# Altium PCB 剥皮器20200614.PCBDOC (part 1 of 2)
Units mm, origin at the board's own origin, x right, y up, seen from the top; angles counter-clockwise.
Board outline 94.23 x 92 mm, 4 copper layers (Top Layer, MidLayer1, MidLayer2, Bottom Layer); 71 components, 81 nets, 348 pads, 574 vias.
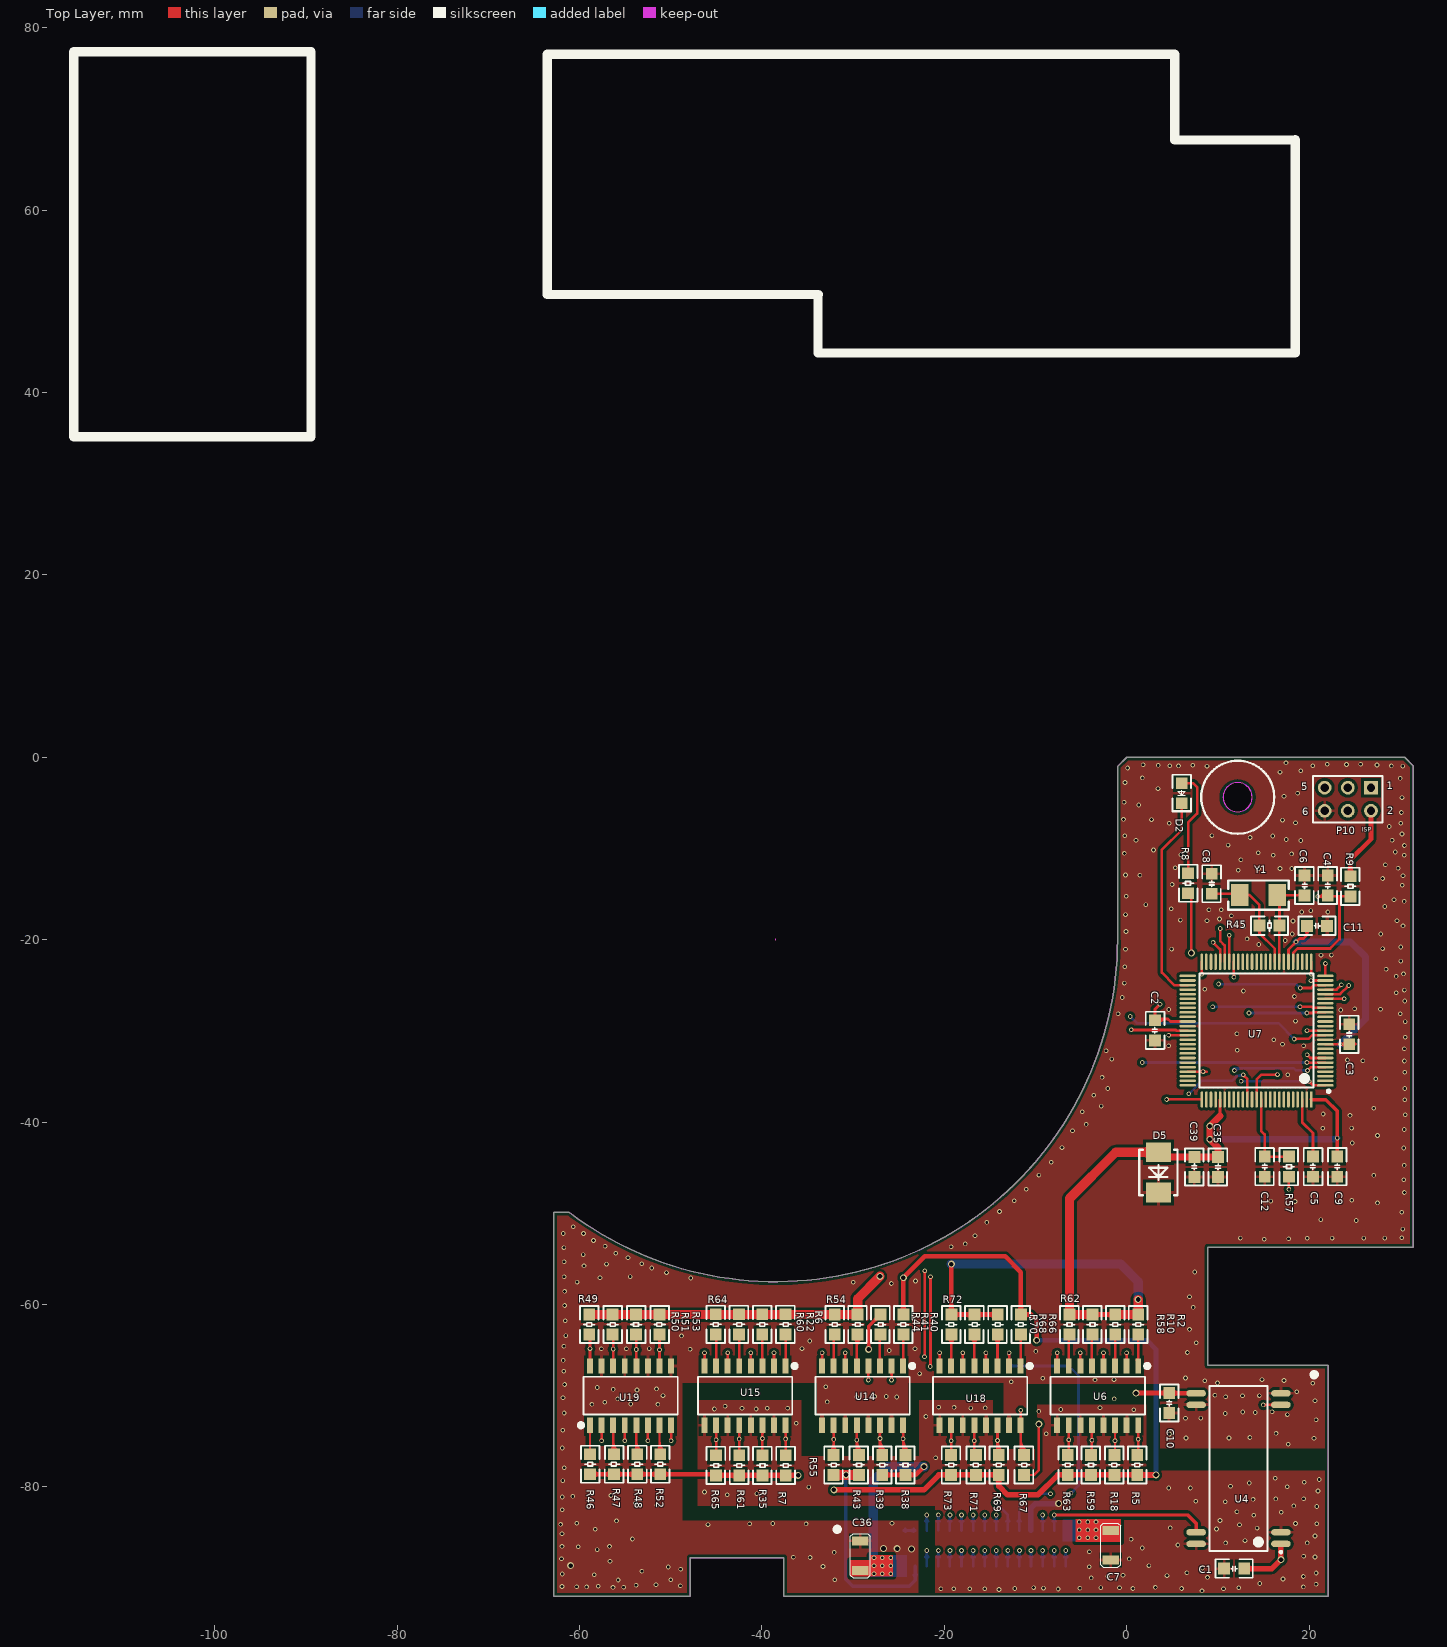
[diagram p0: Top Layer view]
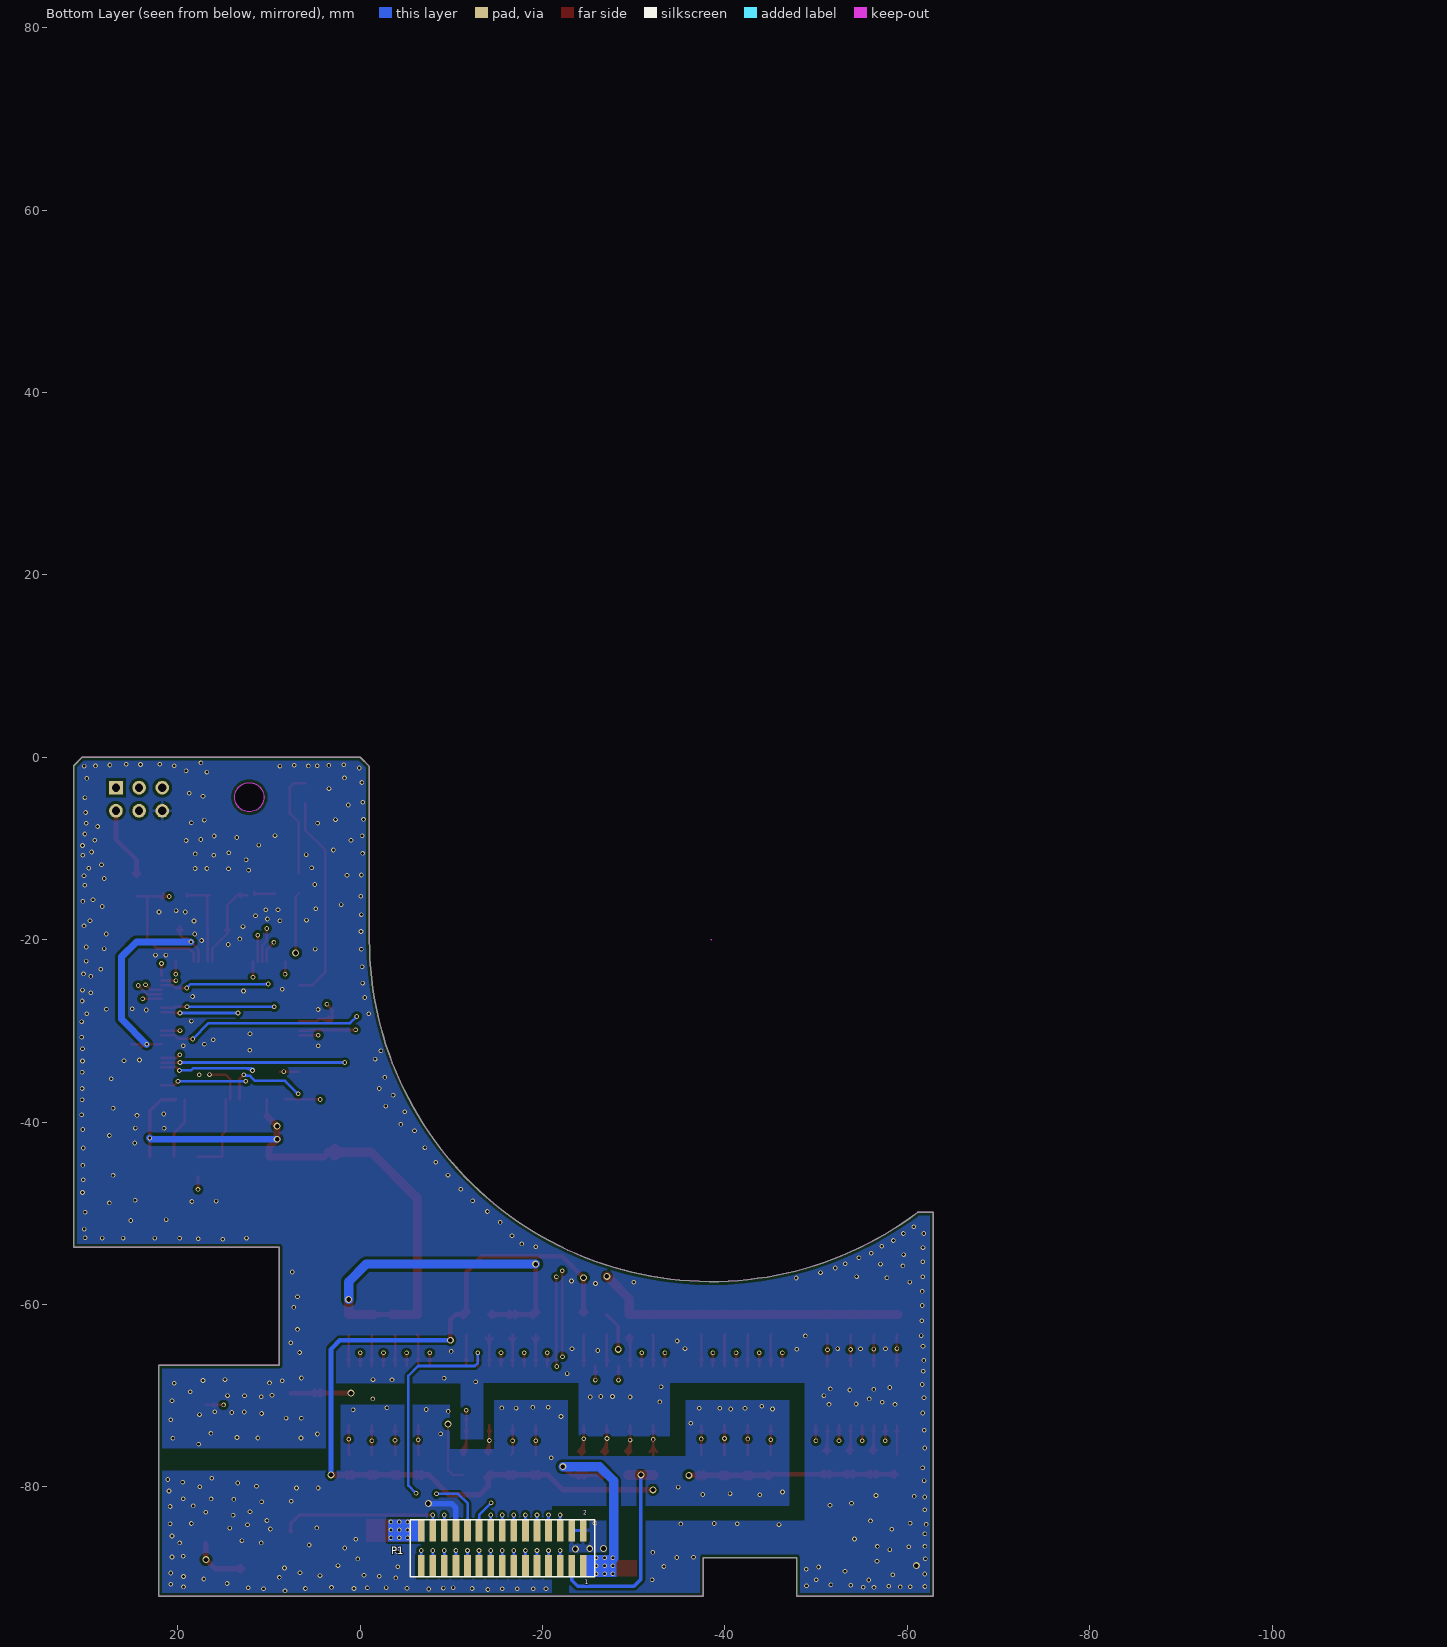
[diagram p1: Bottom Layer view, seen from below]
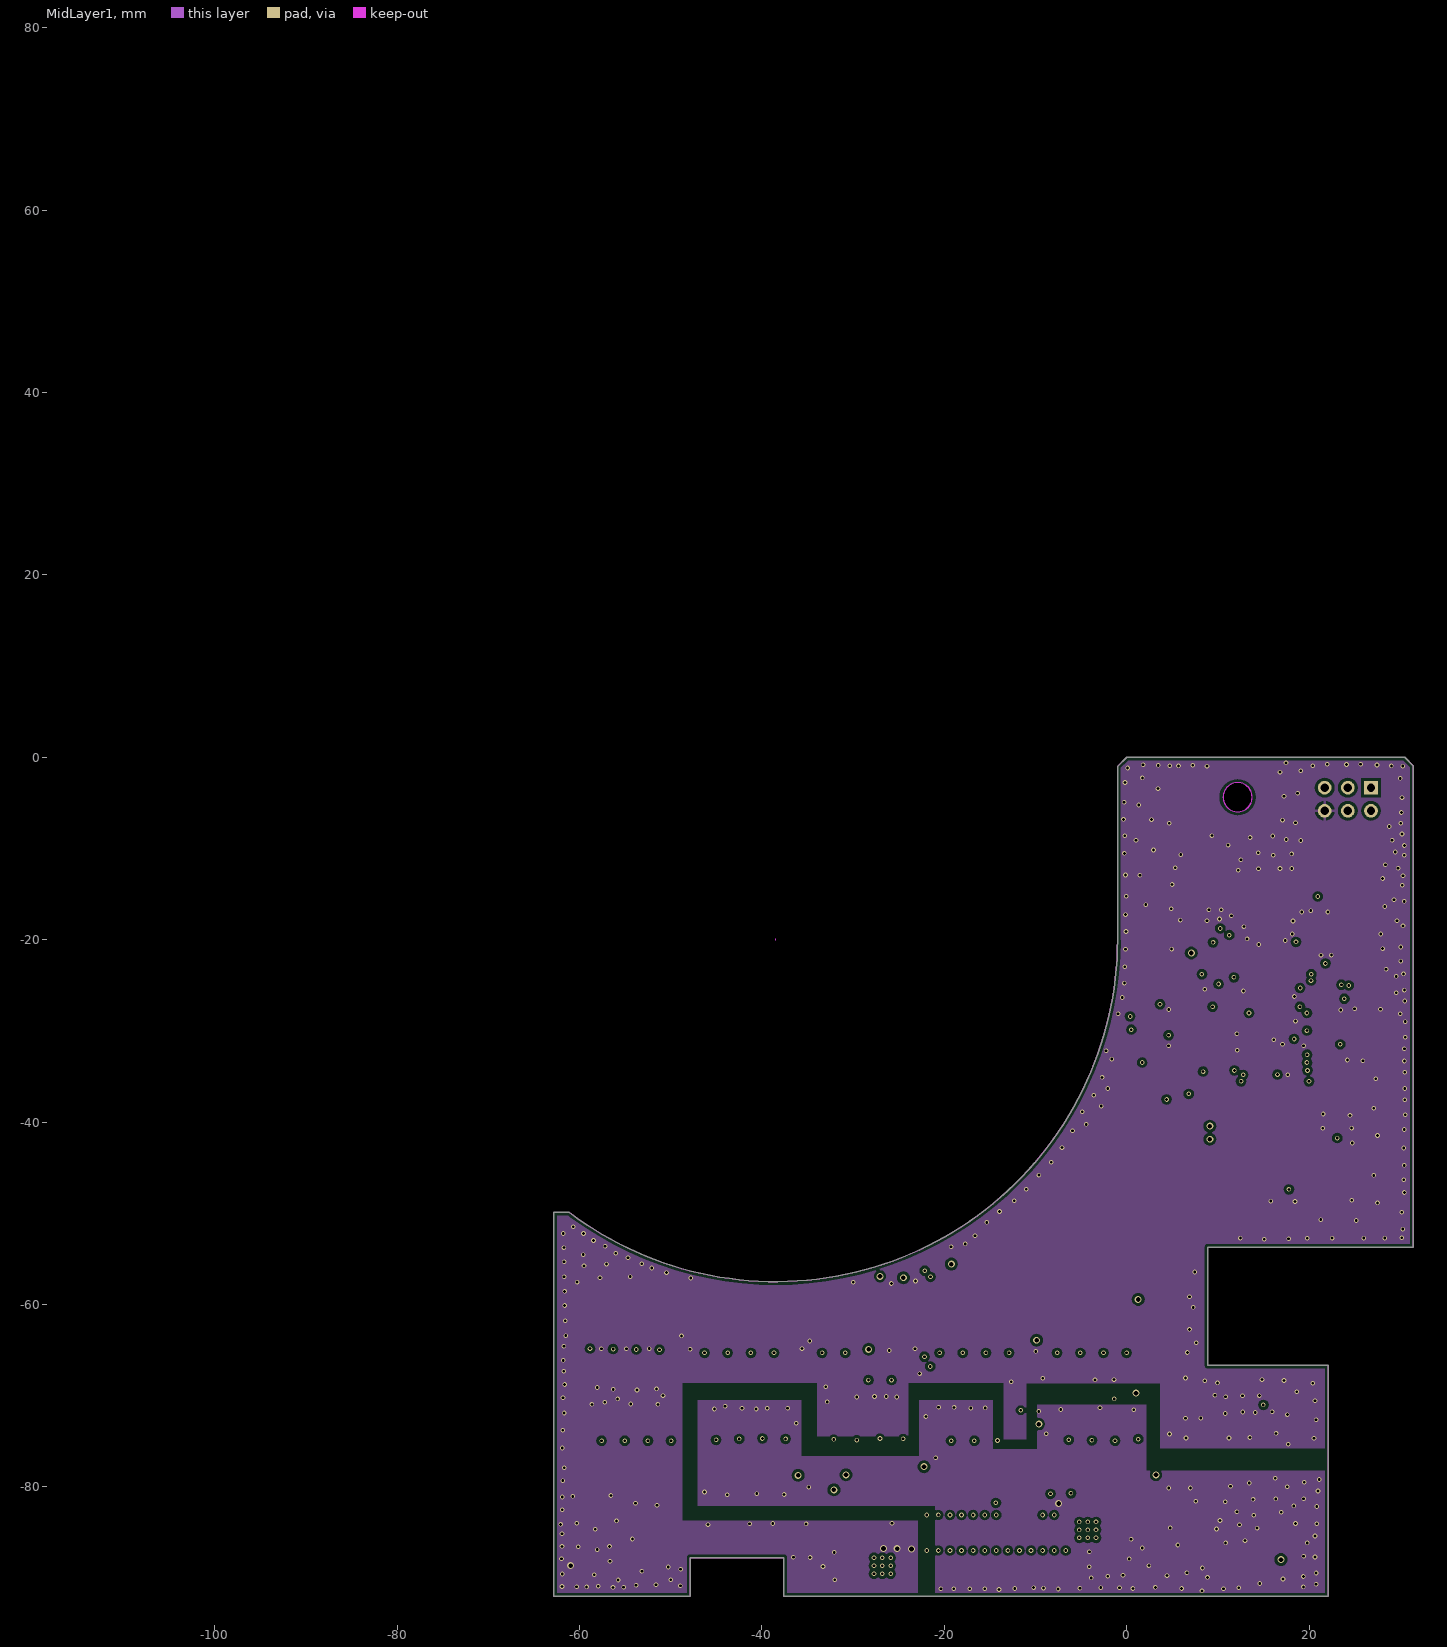
[diagram p2: MidLayer1]
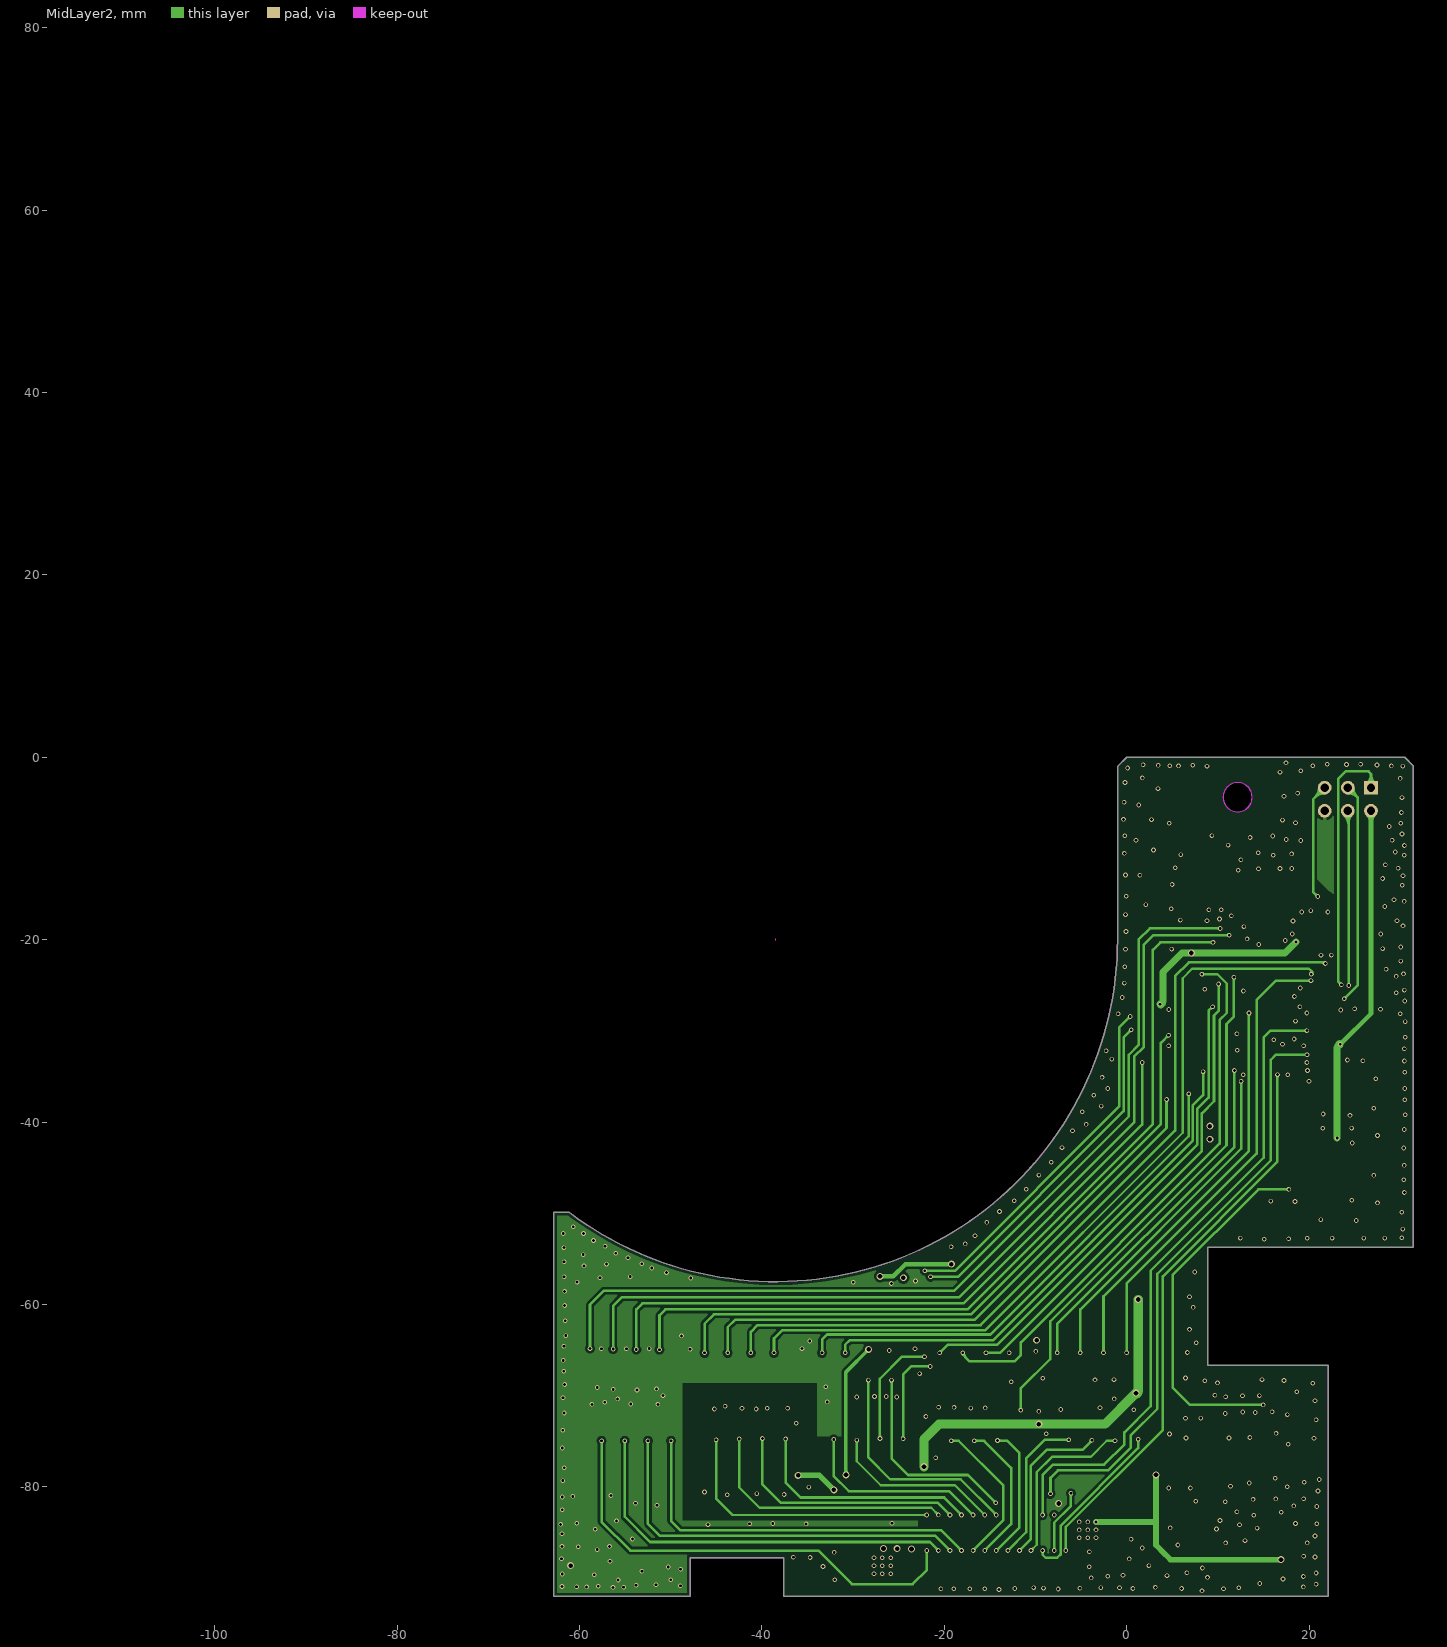
[diagram p3: MidLayer2]

## Layer stack, top to bottom
Top Layer: signal copper 0.0356
Dielectric: core 0.32, FR-4, Dk 4.8
MidLayer1: signal copper 0.0356
Dielectric: prepreg 0.32, FR-4, Dk 4.8
MidLayer2: signal copper 0.0356
Dielectric: core 0.32, FR-4, Dk 4.8
Bottom Layer: signal copper 0.0356

## Board outline
-62.819,-92 -47.879,-92 -47.879,-87.757 -37.592,-87.757 -37.592,-92 22.082,-92 22.082,-66.675 8.89,-66.675 8.89,-53.721 31.415,-53.721 31.415,-0.915 30.5,0 0,0 -1,-1 -1,-20 cw(c-38.5,-20) -61.12,-49.909 -61.12,-49.911 -62.819,-49.911
cut-out: 10.578,-4.375 ccw(c12.178,-4.375) 12.178,-5.975 ccw(c12.178,-4.375) 13.778,-4.375 ccw(c12.178,-4.375) 12.178,-2.775 ccw(c12.178,-4.375)

## Design rules (kind name [scope] priority, off if disabled: settings)
Clearance Clearance_1 [InPolygon] p1: gap=0.305
Clearance [All] p2: gap=0.127
FabricationTestPointUsage TestPointUsage [All] p1: valid=0 allowmultiple=FALSE
FabricationTestpoint Testpoint [All] p1: side=3 testpointundercomponent=TRUE minsize=1.016 maxsize=2.54 preferedsize=1.524 minholesize=0 maxholesize=1.016 preferedholesize=0.813 testpointgrid=0.025 allowsidetop=TRUE allowsidebottom=TRUE usegrid=TRUE gridtolerance=0
PolygonConnect PolygonConnect_1 [IsVia] p1: connectstyle=Direct reliefconductorwidth=0.254 reliefentries=4 polygonreliefangle="90 Angle"
PolygonConnect [All] p2: connectstyle=Relief reliefconductorwidth=0.35 reliefentries=4 polygonreliefangle="90 Angle"
RoutingVias [All] p1: holewidth=0.711 width=1.27 viastyle="Through Hole" minholewidth=0.711 minwidth=1.27 maxholewidth=0.711 maxwidth=1.27
SilkscreenOverComponentPads [All] p1: minsilkscreentomaskgap=0.254
SolderMaskExpansion [All] p1: expansion=0.102
Width [All] p1: maxlimit=10 minlimit=0.1 preferedwidth=0.28
25 further rules are at their usual default settings.

## Components (designator, comment, footprint, x,y, rotation, side; value= is the part's Value field where it differs from the comment)
C1 "104" 0805-C 11.786,-88.976 r0 top
C2 "104" 0805-C 3.099,-29.943 r270 top
C3 "104" 0805-C 24.409,-30.378 r90 top
C4 "104" 0805-C 22.047,-14.072 r90 top
C5 "104" 0805-C 20.429,-44.893 r270 top
C6 "30pF" 0805-C 19.507,-14.072 r90 top
C7 "22uF/25V" 1206C -1.753,-84.785 r270 top
C8 "30pF" 0805-C 9.322,-13.868 r90 top
C9 "104" 0805-C 23.089,-44.893 r270 top
C10 "104" 0805-C 4.674,-70.815 r90 top
C11 "104" 0805-C 20.879,-18.491 r0 top
C12 "104" 0805-C 15.132,-44.893 r90 top
C35 "47uF" 0805-C 10.017,-44.922 r90 top
C36 "22uF/25V" 1206C -29.21,-89.179 r90 top
C39 "47uF" 0805-C 7.426,-44.922 r90 top
D2 "红色" 0805-LED 6.04,-3.939 r90 top
D5 "SMBJ5.0A" LC-SMB(DO-214AA)_S2 3.481,-45.524 r90 top
P1 "Header 15X2" SIP15-1.27 -15.575,-86.743 r0 bottom locked
P10 "2.54针" HDR2X3 26.792,-3.329 r180 top
R2 "330R" 0805-R#1 1.265,-62.206 r270 top
R5 "10K" 0805-R#1 1.164,-77.599 r270 top
R6 "330R" 0805-R#1 -37.413,-62.186 r270 top
R7 "10K" 0805-R#1 -37.394,-77.65 r270 top
R8 "1K" 0805-R#2 6.731,-13.818 r270 top
R9 "10K" 0805-R#2 24.536,-14.148 r90 top
R10 "330R" 0805-R#1 -1.247,-62.211 r270 top
R18 "10K" 0805-R#2 -1.351,-77.599 r90 top
R22 "330R" 0805-R#2 -39.962,-62.186 r90 top
R35 "10K" 0805-R#1 -39.942,-77.65 r270 top
R38 "10K" 0805-R#1 -24.262,-77.599 r270 top
R39 "10K" 0805-R#1 -26.802,-77.599 r270 top
R40 "330R" 0805-R#1 -24.49,-62.206 r270 top
R41 "330R" 0805-R#1 -26.998,-62.211 r270 top
R43 "10K" 0805-R#1 -29.367,-77.599 r270 top
R44 "330R" 0805-R#1 -29.505,-62.211 r270 top
R45 "1M" 0805-R#1 15.662,-18.452 r0 top
R46 "330R" 0805-R#1 -58.844,-77.523 r90 top
R47 "330R" 0805-R#1 -56.228,-77.523 r90 top
R48 "330R" 0805-R#1 -53.675,-77.523 r90 top
R49 "10K" 0805-R#1 -58.944,-62.211 r90 top
R50 "10K" 0805-R#1 -56.375,-62.211 r90 top
R51 "10K" 0805-R#1 -53.806,-62.211 r90 top
R52 "330R" 0805-R#1 -51.16,-77.523 r90 top
R53 "10K" 0805-R#1 -51.237,-62.206 r90 top
R54 "330R" 0805-R#1 -32.012,-62.211 r270 top
R55 "10K" 0805-R#1 -32.136,-77.599 r270 top
R57 "2K" 0805-R#1 17.792,-44.893 r270 top
R58 "330R" 0805-R#1 -3.76,-62.211 r270 top
R59 "10K" 0805-R#1 -3.916,-77.599 r270 top
R60 "330R" 0805-R#1 -42.51,-62.186 r270 top
R61 "10K" 0805-R#1 -42.491,-77.65 r270 top
R62 "330R" 0805-R#1 -6.273,-62.211 r270 top
R63 "10K" 0805-R#1 -6.456,-77.599 r270 top
R64 "330R" 0805-R#1 -45.059,-62.186 r270 top
R65 "10K" 0805-R#1 -45.039,-77.65 r270 top
R66 "330R" 0805-R#1 -11.607,-62.211 r270 top
R67 "10K" 0805-R#1 -11.257,-77.599 r270 top
R68 "330R" 0805-R#1 -14.147,-62.211 r270 top
R69 "10K" 0805-R#1 -14.026,-77.599 r270 top
R70 "330R" 0805-R#1 -16.687,-62.211 r270 top
R71 "10K" 0805-R#1 -16.54,-77.599 r270 top
R72 "330R" 0805-R#1 -19.227,-62.211 r270 top
R73 "10K" 0805-R#1 -19.258,-77.599 r270 top
U4 "ISO124U" SOIC127P1030X265-8 12.268,-78.003 r180 top
U6 "TLP291-4" TLP291-4 -3.18,-70.004 r180 top
U7 "ATmega2560-16AU" LC-LQFP-100_14x14x05P 14.245,-29.974 r90 top
U14 "TLP291-4" TLP291-4 -28.961,-70.004 r180 top
U15 "TLP291-4" TLP291-4 -41.852,-70.004 r180 top
U18 "TLP291-4" TLP291-4 -16.071,-70.004 r180 top
U19 "TLP291-4" TLP291-4 -54.412,-70.004 r0 top
Y1 "16M" LC-SMD-5032_2P 14.453,-15.113 r180 top

## Footprints (in the part's own frame and the unit in brackets; to place one, negate y for a bottom-side part, rotate by r counter-clockwise, add the part's x,y. Pads: shape width x height; smd on the part's side, far side on the other; paste and mask are expansions set on the pad)
0805-C [mil] "0805贴片电容"
  rect 51x51 smd: 1(-43.31,0) 2(43.31,0)
  silkscreen extent -80,-40 80,41
0805-LED [mil] "0805LED"
  rect 51x51 smd: 1(43.31,0) 2(-43.31,0)
  silkscreen extent -81,-41 80,41
0805-R#1 [mil] "0805电阻"
  rect 51x51 smd: 1(43.31,0) 2(-43.31,0)
  silkscreen extent -80,-41 80,40
0805-R#2 [mil] "0805电阻"
  rect 51x51 smd: 1(-43.31,0) 2(43.31,0)
  silkscreen extent -80,-40 80,41
1206C [mm]
  rect 1x1.8 smd: 1(0,0) 2(3.25,0)
  silkscreen extent -0.8,-1.1 4.05,1.1
HDR2X3 [mm] "Connector; Header; 3x2 Position"
  rect 1.5x1.5 hole 0.9: 1(0,0)
  round 1.5 hole 0.9: 2(0,2.54) 3(2.54,0) 4(2.54,2.54) 5(5.08,0) 6(5.08,2.54)
  silkscreen extent -1.27,-1.27 6.35,3.81
LC-LQFP-100_14x14x05P [mm]
  oval 0.28x1.8 smd mask+0.051: 1(-6,-7.55) 2(-5.5,-7.55) 3(-5,-7.55) 4(-4.5,-7.55) 5(-4,-7.55) 6(-3.5,-7.55) 7(-3,-7.55) 8(-2.5,-7.55) 9(-2,-7.55) 10(-1.5,-7.55) 11(-1,-7.55) 12(-0.5,-7.55) 13(0,-7.55) 14(0.5,-7.55) 15(1,-7.55) 16(1.5,-7.55) 17(2,-7.55) 18(2.5,-7.55) 19(3,-7.55) 20(3.5,-7.55) 21(4,-7.55) 22(4.5,-7.55) 23(5,-7.55) 24(5.5,-7.55) 25(6,-7.55) 51(6,7.55) 52(5.5,7.55) 53(5,7.55) 54(4.5,7.55) 55(4,7.55) 56(3.5,7.55) 57(3,7.55) 58(2.5,7.55) 59(2,7.55) 60(1.5,7.55) 61(1,7.55) 62(0.5,7.55) 63(0,7.55) 64(-0.5,7.55) 65(-1,7.55) 66(-1.5,7.55) 67(-2,7.55) 68(-2.5,7.55) 69(-3,7.55) 70(-3.5,7.55) 71(-4,7.55) 72(-4.5,7.55) 73(-5,7.55) 74(-5.5,7.55) 75(-6,7.55)
  oval 1.8x0.28 smd mask+0.051: 26(7.55,-6) 27(7.55,-5.5) 28(7.55,-5) 29(7.55,-4.5) 30(7.55,-4) 31(7.55,-3.5) 32(7.55,-3) 33(7.55,-2.5) 34(7.55,-2) 35(7.55,-1.5) 36(7.55,-1) 37(7.55,-0.5) 38(7.55,0) 39(7.55,0.5) 40(7.55,1) 41(7.55,1.5) 42(7.55,2) 43(7.55,2.5) 44(7.55,3) 45(7.55,3.5) 46(7.55,4) 47(7.55,4.5) 48(7.55,5) 49(7.55,5.5) 50(7.55,6) 76(-7.55,6) 77(-7.55,5.5) 78(-7.55,5) 79(-7.55,4.5) 80(-7.55,4) 81(-7.55,3.5) 82(-7.55,3) 83(-7.55,2.5) 84(-7.55,2) 85(-7.55,1.5) 86(-7.55,1) 87(-7.55,0.5) 88(-7.55,0) 89(-7.55,-0.5) 90(-7.55,-1) 91(-7.55,-1.5) 92(-7.55,-2) 93(-7.55,-2.5) 94(-7.55,-3) 95(-7.55,-3.5) 96(-7.55,-4) 97(-7.55,-4.5) 98(-7.55,-5) 99(-7.55,-5.5) 100(-7.55,-6)
  silkscreen extent -6.8,-8.05 6.25,6.25
LC-SMB(DO-214AA)_S2 [mm]
  rect 2.159x2.743 smd: 1(2.21,0) 2(-2.21,0)
  silkscreen extent -2.5,-2.1 2.5,2.1
LC-SMD-5032_2P [mm]
  rect 1.9x2.4 smd: 1(-2.05,0) 2(2.05,0)
  silkscreen extent -3.32,-1.6 3.32,1.6
SIP15-1.27 [mm]
  rrect5% 0.74x2.4 smd: 1(-8.89,1.95) 2(-8.89,-1.95) 3(-7.62,1.95) 4(-7.62,-1.95) 5(-6.35,1.95) 6(-6.35,-1.95) 7(-5.08,1.95) 8(-5.08,-1.95) 9(-3.81,1.95) 10(-3.81,-1.95) 11(-2.54,1.95) 12(-2.54,-1.95) 13(-1.27,1.95) 14(-1.27,-1.95) 15(0,1.95) 16(0,-1.95) 17(1.27,1.95) 18(1.27,-1.95) 19(2.54,1.95) 20(2.54,-1.95) 21(3.81,1.95) 22(3.81,-1.95) 23(5.08,1.95) 24(5.08,-1.95) 25(6.35,1.95) 26(6.35,-1.95) 27(7.62,1.95) 28(7.62,-1.95) 29(8.89,1.95) 30(8.89,-1.95)
  silkscreen extent -10.16,-3.15 10.11,3.15
SOIC127P1030X265-8 [mm] "SOIC, 28-Leads, Body 18.1x7.6mm (max), Pitch 1.27mm, IPC Medium Density"
  oval 2.15x0.7 smd: 1(-4.65,8.255) 2(-4.65,6.985) 13(-4.65,-6.985) 14(-4.65,-8.255) 15(4.65,-8.255) 16(4.65,-6.985) 27(4.65,6.985) 28(4.65,8.255)
  silkscreen extent -4.78,-9.05 3.18,9.28
TLP291-4 [mm]
  rect 0.65x1.65 smd: 1(-4.445,-3.25) 2(-3.175,-3.25) 3(-1.905,-3.25) 4(-0.635,-3.25) 5(0.635,-3.25) 6(1.905,-3.25) 7(3.175,-3.25) 8(4.445,-3.25) 9(4.445,3.25) 10(3.175,3.25) 11(1.905,3.25) 12(0.635,3.25) 13(-0.635,3.25) 14(-1.905,3.25) 15(-3.175,3.25) 16(-4.445,3.25)
  silkscreen extent -5.63,-3.45 5.18,2.08, body extent -5.17,-3.5 5.18,3.5, height 2.3

## Part data
C1 C2 C3 C4 C5 C6 C8 C9 C10 C12 C35: library part Cap, "Capacitor"
C7 C11 C36 C39: library part CAP, "Capacitor"
D2: library part LED0, "Typical INFRARED GaAs LED"
D5: library part TVS, "TVS"
P1: "Header, 15-Pin, Dual row"
P10: library part "Header 3X2", "Header, 3-Pin, Dual row"
R2 R5 R6 R7 R8 R9 R10 R18 R22 R35 R38 R39 R40 R41 R43 R44 R45 R46 R47 R48 R49 R50 R51 R52 R53 R54 R55 R57 R58 R59 R60 R61 R62 R63 R64 R65 R66 R67 R68 R69 R70 R71 R72 R73: library part Res2, "Resistor"
U6 U14 U15 U18 U19: "Photocouplers GaAs Infrared LED & Photo Transistor"
U7: library part "Arduino MEGA 2560"
Y1: library part XTAL, "Crystal Oscillator"

## Via types
v1: diameter 0.508, hole 0.305, Top Layer to Bottom Layer, tented both sides, 552 vias
v2: diameter 0.762, hole 0.508, Top Layer to Bottom Layer, tented both sides, 22 vias

## Nets (pads, with @x,y where several pads share a name; then routed paths per layer and width w, separated by ;. In a path a pad name is that pad's centre, name@x,y a point inside that pad or via, vN(x,y) a via of type N, cw(c..) or ccw(c..) an arc to the next point about the centre after c; other vN are vias at no path point)
+3.3V: P1.3 R41.2 R43.1 R55.1 | length 46.7
  Top Layer w0.381: v2@-28.43,-64.788 ccw(c-28.756,-64.462) -28.296,-64.462 ccw(c-27.836,-64.462) v2@-28.161,-64.788 ; v2(-28.296,-64.922) -28.296,-62.409 R41.2@-26.998,-61.111
  Top Layer w1.1: R55.1@-32.136,-78.699 R43.1@-29.367,-78.699
  MidLayer2 w0.381: v2@-30.92,-78.554 ccw(c-31.245,-78.229) -30.785,-78.229 ccw(c-30.325,-78.229) v2@-30.65,-78.554 ; v2(-30.785,-78.689) -30.785,-67.412 v2(-28.296,-64.922) ; v2@-28.486,-64.922 cw(c-28.946,-64.922) -28.621,-65.248 cw(c-28.296,-65.573) v2@-28.296,-65.113
  Bottom Layer w0.381: v2@-30.92,-78.824 cw(c-31.245,-79.149) -30.785,-79.149 cw(c-30.325,-79.149) v2@-30.65,-78.824 ; v2(-30.785,-78.689) -30.785,-90.145 -30.023,-90.907 -23.851,-90.907 -23.195,-90.251 P1.3@-23.195,-88.693 ; P1.3@-23.322,-89.65 cw(c-23.628,-89.956) -23.195,-89.956 cw(c-22.762,-89.956) P1.3@-23.068,-89.65
+5V: C1.2 C7.1 P1.30 R5.1 R7.1 R18.1 R35.1 R40.2 R46.2 R47.2 R48.2 R52.2 R59.1 R61.1 R63.1 R65.1 R66.2 R69.1 R71.1 R73.1 U4.1 | length 211.2
  Top Layer w0.254: R47.2@-56.228,-78.623 R48.2@-53.675,-78.623 ; R47.2@-55.86,-78.991 cw(c-54.971,-79.88) -54.971,-78.623 cw(c-54.971,-77.366) R47.2@-55.86,-78.254 ; R48.2@-54.043,-78.991 ccw(c-54.932,-79.88) -54.932,-78.623 ccw(c-54.932,-77.366) R48.2@-54.043,-78.254
  Top Layer w0.508: R46.2@-58.844,-78.623 R47.2@-56.228,-78.623 R48.2@-53.675,-78.623 R52.2@-51.16,-78.623 -45.166,-78.623 R65.1@-45.039,-78.75 ; R46.2@-58.566,-78.901 cw(c-57.893,-79.573) -57.893,-78.623 cw(c-57.893,-77.672) R46.2@-58.566,-78.344 ; R47.2@-56.506,-78.901 ccw(c-57.178,-79.573) -57.178,-78.623 ccw(c-57.178,-77.672) R47.2@-56.506,-78.344 ; R47.2@-55.949,-78.901 cw(c-55.277,-79.573) -55.277,-78.623 cw(c-55.277,-77.672) R47.2@-55.949,-78.344 ; R48.2@-53.953,-78.901 ccw(c-54.625,-79.573) -54.625,-78.623 ccw(c-54.625,-77.672) R48.2@-53.953,-78.344 ; R48.2@-53.397,-78.901 cw(c-52.725,-79.573) -52.725,-78.623 cw(c-52.725,-77.672) R48.2@-53.397,-78.344 ; R52.2@-51.439,-78.901 ccw(c-52.111,-79.573) -52.111,-78.623 ccw(c-52.111,-77.672) R52.2@-51.439,-78.344 ; R52.2@-50.882,-78.901 cw(c-50.21,-79.573) -50.21,-78.623 cw(c-50.21,-77.672) R52.2@-50.882,-78.344 ; R40.2@-24.769,-60.828 ccw(c-25.441,-60.156) -24.49,-60.156 ccw(c-23.54,-60.156) R40.2@-24.212,-60.828 ; R40.2@-24.49,-61.106 -24.49,-57.079 v2(-24.486,-57.074) -22.149,-54.737 -13.335,-54.737 -11.607,-56.465 R66.2@-11.607,-61.111 -10.466,-61.111 -9.881,-61.697 v2(-9.881,-63.932) ; R66.2@-11.885,-60.833 ccw(c-12.557,-60.161) -11.607,-60.161 ccw(c-10.656,-60.161) -11.328,-60.833 ccw(c-10.656,-60.161) -10.656,-61.111 ccw(c-10.656,-62.062) R66.2@-11.328,-61.389
  Top Layer w0.6: R65.1@-45.039,-78.75 R61.1@-42.491,-78.75 ; R65.1@-44.793,-78.996 cw(c-44.2,-79.589) -44.2,-78.75 cw(c-44.2,-77.91) R65.1@-44.793,-78.504 ; R61.1@-42.736,-78.996 ccw(c-43.33,-79.589) -43.33,-78.75 ccw(c-43.33,-77.91) R61.1@-42.736,-78.504 ; R35.1@-39.696,-78.996 cw(c-39.103,-79.589) -39.103,-78.75 cw(c-39.103,-77.91) R35.1@-39.696,-78.504 ; R7.1@-37.639,-78.996 ccw(c-38.233,-79.589) -38.233,-78.75 ccw(c-38.233,-77.91) R7.1@-37.639,-78.504 ; R7.1@-37.148,-78.996 cw(c-36.554,-79.589) -36.554,-78.75 cw(c-36.554,-77.91) R7.1@-37.148,-78.504 ; v2@-36.017,-78.765 v2(-36.033,-78.75) R7.1@-37.394,-78.75 R35.1@-39.942,-78.75 ; v2(-32.106,-80.34) -22.25,-80.34 -20.609,-78.699 R73.1@-19.258,-78.699 R71.1@-16.54,-78.699 R69.1@-14.026,-78.699 -14.026,-79.929 -13.056,-80.899 -9.754,-80.899 -7.553,-78.699 R63.1@-6.456,-78.699 R59.1@-3.916,-78.699 R18.1@-1.351,-78.699 R5.1@1.164,-78.699 ; R73.1@-19.504,-78.945 ccw(c-20.097,-79.538) -20.097,-78.699 ccw(c-20.097,-77.859) R73.1@-19.504,-78.453 ; R73.1@-19.012,-78.945 cw(c-18.419,-79.538) -18.419,-78.699 cw(c-18.419,-77.859) R73.1@-19.012,-78.453 ; R71.1@-16.786,-78.945 ccw(c-17.38,-79.538) -17.38,-78.699 ccw(c-17.38,-77.859) R71.1@-16.786,-78.453 ; R71.1@-16.294,-78.945 cw(c-15.701,-79.538) -15.701,-78.699 cw(c-15.701,-77.859) R71.1@-16.294,-78.453 ; R69.1@-14.271,-78.453 cw(c-14.865,-77.859) -14.865,-78.699 cw(c-14.865,-79.538) -14.271,-78.945 cw(c-14.865,-79.538) -14.026,-79.538 cw(c-13.186,-79.538) R69.1@-13.78,-78.945 ; R63.1@-6.702,-78.945 ccw(c-7.296,-79.538) -7.296,-78.699 ccw(c-7.296,-77.859) R63.1@-6.702,-78.453 ; R63.1@-6.211,-78.945 cw(c-5.617,-79.538) -5.617,-78.699 cw(c-5.617,-77.859) R63.1@-6.211,-78.453 ; R59.1@-4.162,-78.945 ccw(c-4.756,-79.538) -4.756,-78.699 ccw(c-4.756,-77.859) R59.1@-4.162,-78.453 ; R59.1@-3.671,-78.945 cw(c-3.077,-79.538) -3.077,-78.699 cw(c-3.077,-77.859) R59.1@-3.671,-78.453 ; R18.1@-1.597,-78.945 ccw(c-2.19,-79.538) -2.19,-78.699 ccw(c-2.19,-77.859) R18.1@-1.597,-78.453 ; R18.1@-1.105,-78.945 cw(c-0.512,-79.538) -0.512,-78.699 cw(c-0.512,-77.859) R18.1@-1.105,-78.453 ; R5.1@0.918,-78.945 ccw(c0.324,-79.538) 0.324,-78.699 ccw(c0.324,-77.859) R5.1@0.918,-78.453 ; C1.2@12.886,-88.976 15.926,-88.976 v2(16.918,-87.984) U4.1@16.918,-86.258 ; C1.2@13.131,-89.222 cw(c13.725,-89.816) 13.725,-88.976 cw(c13.725,-88.137) C1.2@13.131,-88.73 ; R61.1@-42.491,-78.75 R35.1@-39.942,-78.75 ; R61.1@-42.491,-78.75 R35.1@-39.942,-78.75 ; -41.651,-78.75 ccw(c-41.651,-79.589) -42.245,-78.996 cw(c-41.651,-79.589) -41.651,-78.75 ; -41.651,-78.75 cw(c-41.651,-77.91) -42.245,-78.504 ccw(c-41.651,-77.91) -41.651,-78.75 ; -40.782,-78.75 ccw(c-40.782,-77.91) -40.188,-78.504 cw(c-40.782,-77.91) -40.782,-78.75 ; -40.782,-78.75 cw(c-40.782,-79.589) -40.188,-78.996 ccw(c-40.782,-79.589) -40.782,-78.75
  Top Layer w0.635: R5.1@1.164,-78.699 v2(3.21,-78.699) ; R5.1@1.397,-78.932 cw(c1.961,-79.496) 1.961,-78.699 cw(c1.961,-77.902) R5.1@1.397,-78.465
  MidLayer2 w0.6: v2(-36.033,-78.75) -33.696,-78.75 v2(-32.106,-80.34) ; 4.184,-87.369 4.799,-87.984 v2(16.918,-87.984)
  MidLayer2 w0.635: v1(-3.362,-83.849) 2.934,-83.849 3.21,-84.125 ; v2(3.21,-78.699) 3.21,-84.125 ; 4.184,-87.369 3.21,-86.395 3.21,-84.125
  Bottom Layer w0.508: v2(-9.881,-63.932) 2.235,-63.932 3.21,-64.907 v2(3.21,-78.699)
  other v1: -5.191,-85.602 -4.277,-85.602 -3.362,-85.602 -5.191,-84.725 -4.277,-84.725 -3.362,-84.725 -5.191,-83.849 -4.277,-83.849
+5VV: C2.1 C3.1 C9.1 C10.2 C11.1 C35.2 C36.1 C39.2 D5.1 P1.1 P10.2 R2.2 R6.2 R8.2 R9.2 R10.2 R22.2 R38.1 R39.1 R44.2 R49.1 R50.1 R51.1 R53.1 R54.2 R58.2 R60.2 R62.2 R64.2 R67.1 R68.2 R70.2 R72.2 U4.15 U7.10 U7.31 U7.61 U7.80 U7.100 | length 401.5
  Top Layer w0.254: v2(-22.225,-77.8) v2@-22.022,-77.597 ; R67.1@-11.257,-78.699 -10.17,-78.699 -9.627,-78.156 v2(-9.627,-73.127) ; R8.2@6.731,-14.918 7.087,-15.273 v2(7.087,-21.463)
  Top Layer w0.305: C2.1@3.246,-28.964 cw(c3.852,-29.46) 3.852,-28.677 ; C2.1@3.449,-28.493 ccw(c3.892,-28.049) 3.892,-28.677 ; C2.1@3.482,-29.157 cw(c4.496,-29.986) 4.496,-28.677 ; v1(3.658,-27.076) 3.099,-27.635 C2.1@3.099,-28.843 3.265,-28.677 4.496,-28.677 ; U7.61@6.695,-28.974 4.793,-28.974 4.496,-28.677 ; C35.2@10.017,-43.822 C35.2@10.245,-43.594 ; 10.245,-39.319 U7.80@10.245,-37.524 ; U7.31@17.745,-22.424 17.745,-21.092 18.974,-19.863 19.38,-19.863 19.779,-19.464 ; 18.376,-20.461 ccw(c18.159,-20.244) v1@18.466,-20.244 ; v1@18.567,-20.142 ccw(c18.567,-19.836) 18.784,-20.052 ; C11.1@19.487,-18.892 cw(c19.071,-19.464) 19.779,-19.464 ; C11.1@19.779,-18.491 19.779,-19.464 ; C11.1@20.07,-18.892 ccw(c20.487,-19.464) 19.779,-19.464 ; U7.10@21.795,-31.474 v1(23.419,-31.474) ; C3.1@24.011,-31.773 ccw(c23.419,-32.21) v1(23.419,-31.474) ; C3.1@24.015,-31.178 cw(c23.419,-30.724) v1(23.419,-31.474) ; 25.09,-31.429 25.046,-31.474 v1(23.419,-31.474)
  Top Layer w0.381: U7.100@20.255,-37.524 20.272,-37.541 21.844,-37.541 23.089,-38.786 v1(23.089,-41.758) C9.1@23.089,-43.793
  Top Layer w0.508: R50.1@-56.375,-61.111 R51.1@-53.806,-61.111 -51.241,-61.111 R53.1@-51.237,-61.106 -45.079,-61.106 R64.2@-45.059,-61.086 R60.2@-42.51,-61.086 R22.2@-39.962,-61.086 R6.2@-37.413,-61.086 -32.038,-61.086 R54.2@-32.012,-61.111 ; R50.1@-56.097,-61.389 cw(c-55.425,-62.062) -55.425,-61.111 cw(c-55.425,-60.161) R50.1@-56.097,-60.833 ; R51.1@-54.084,-61.389 ccw(c-54.756,-62.062) -54.756,-61.111 ccw(c-54.756,-60.161) R51.1@-54.084,-60.833 ; R51.1@-53.527,-61.389 cw(c-52.855,-62.062) -52.855,-61.111 cw(c-52.855,-60.161) R51.1@-53.527,-60.833 ; -52.198,-61.111 ccw(c-52.198,-60.145) R53.1@-51.515,-60.828 ; -52.176,-61.111 cw(c-52.176,-62.046) R53.1@-51.515,-61.385 ; R53.1@-50.958,-61.385 cw(c-50.286,-62.057) -50.286,-61.106 cw(c-50.286,-60.156) R53.1@-50.958,-60.828 ; -46.059,-61.106 ccw(c-46.059,-60.085) R64.2@-45.337,-60.807 ; -45.959,-61.106 cw(c-45.959,-61.986) R64.2@-45.337,-61.364 ; R64.2@-44.78,-61.364 cw(c-44.108,-62.036) -44.108,-61.086 cw(c-44.108,-60.135) R64.2@-44.78,-60.807 ; R60.2@-42.789,-61.364 ccw(c-43.461,-62.036) -43.461,-61.086 ccw(c-43.461,-60.135) R60.2@-42.789,-60.807 ; R60.2@-42.232,-61.364 cw(c-41.56,-62.036) -41.56,-61.086 cw(c-41.56,-60.135) R60.2@-42.232,-60.807 ; R22.2@-40.24,-61.364 ccw(c-40.912,-62.036) -40.912,-61.086 ccw(c-40.912,-60.135) R22.2@-40.24,-60.807 ; R22.2@-39.683,-61.364 cw(c-39.011,-62.036) -39.011,-61.086 cw(c-39.011,-60.135) R22.2@-39.683,-60.807 ; R6.2@-37.692,-61.364 ccw(c-38.364,-62.036) -38.364,-61.086 ccw(c-38.364,-60.135) R6.2@-37.692,-60.807 ; R6.2@-37.135,-61.364 cw(c-36.463,-62.036) -36.463,-61.086 cw(c-36.463,-60.135) R6.2@-37.135,-60.807 ; -33.024,-61.086 cw(c-33.024,-62.123) R54.2@-32.291,-61.389 ; -32.902,-61.086 ccw(c-32.902,-60.222) R54.2@-32.291,-60.833 ; R39.1@-26.802,-78.699 R38.1@-24.262,-78.699 -23.124,-78.699 v2(-22.225,-77.8) ; R39.1@-26.523,-78.977 cw(c-25.851,-79.649) -25.851,-78.699 cw(c-25.851,-77.748) R39.1@-26.523,-78.42 ; R38.1@-24.54,-78.977 ccw(c-25.212,-79.649) -25.212,-78.699 ccw(c-25.212,-77.748) R38.1@-24.54,-78.42 ; R38.1@-23.983,-78.977 cw(c-23.311,-79.649) -23.311,-78.699 cw(c-23.311,-77.748) R38.1@-23.983,-78.42 ; R72.2@-19.505,-60.833 ccw(c-20.177,-60.161) -19.227,-60.161 ccw(c-18.276,-60.161) -18.948,-60.833 ccw(c-18.276,-60.161) -18.276,-61.111 ccw(c-18.276,-62.062) R72.2@-18.948,-61.389 ; v2@-19.228,-55.575 v2(-19.227,-55.576) R72.2@-19.227,-61.111 R70.2@-16.687,-61.111 R68.2@-14.147,-61.111 ; R70.2@-16.965,-61.389 ccw(c-17.637,-62.062) -17.637,-61.111 ccw(c-17.637,-60.161) R70.2@-16.965,-60.833 ; R70.2@-16.408,-61.389 cw(c-15.736,-62.062) -15.736,-61.111 cw(c-15.736,-60.161) R70.2@-16.408,-60.833 ; R68.2@-14.425,-61.389 ccw(c-15.097,-62.062) -15.097,-61.111 ccw(c-15.097,-60.161) R68.2@-14.425,-60.833 ; R58.2@-3.76,-61.111 R10.2@-1.247,-61.111 ; R58.2@-3.482,-61.389 cw(c-2.81,-62.062) -2.81,-61.111 cw(c-2.81,-60.161) R58.2@-3.482,-60.833 ; R10.2@-1.526,-61.389 ccw(c-2.198,-62.062) -2.198,-61.111 ccw(c-2.198,-60.161) R10.2@-1.526,-60.833 ; v2(1.016,-69.723) 1.024,-69.715 C10.2@4.674,-69.715 4.707,-69.748 U4.15@7.618,-69.748 ; R2.2@1.261,-61.111 R2.2@1.265,-61.106 ; C10.2@4.395,-69.994 ccw(c3.723,-70.666) 3.723,-69.715 ccw(c3.723,-68.765) C10.2@4.395,-69.437 ; C10.2@4.952,-69.994 cw(c5.544,-70.586) 5.544,-69.748 ; C10.2@4.952,-69.437 ccw(c5.704,-68.685) 5.704,-69.748 ; R9.2@24.258,-12.769 ccw(c23.586,-12.097) 24.536,-12.097 ccw(c25.487,-12.097) R9.2@24.815,-12.769 ; R9.2@24.536,-13.048 24.536,-11.252 26.792,-8.996 P10.2@26.792,-5.869
  Top Layer w0.762: D5.1@3.481,-43.314 3.989,-43.822 C35.2@10.017,-43.822 10.017,-42.783 v2(9.119,-41.885) v2(9.119,-40.445) 10.245,-39.319
  Top Layer w1.016: R49.1@-58.944,-61.111 R54.2@-32.012,-61.111 R44.2@-29.505,-61.111 -29.505,-59.375 v2(-27.051,-56.921) ; R58.2@-3.76,-61.111 R62.2@-6.273,-61.111 -6.273,-48.386 -1.201,-43.314 D5.1@3.481,-43.314 ; R10.2@-1.247,-61.111 R2.2@1.261,-61.111 ; R2.2@1.265,-61.106 v2(1.265,-59.457) ; D5.1@2.785,-43.718 ccw(c1.809,-44.693) 1.809,-43.314 ccw(c1.809,-41.934) D5.1@2.785,-42.91
  MidLayer2 w0.508: v2(-27.051,-56.921) -25.603,-56.921 -24.258,-55.576 v2(-19.227,-55.576) ; v1(23.419,-31.474) 26.792,-28.1 P10.2@26.792,-5.869 ; P10.2@26.441,-6.22 cw(c25.595,-7.067) 26.792,-7.067 cw(c27.99,-7.067) P10.2@27.143,-6.22
  MidLayer2 w0.762: v1(3.658,-27.076) 3.962,-26.772 ; v1@3.72,-27.187 ccw(c3.485,-26.772) 3.962,-26.772 ; v1@3.747,-27.166 ccw(c3.228,-26.647) 3.962,-26.647 ; v1(18.567,-20.244) 17.348,-21.463 v2(7.087,-21.463) 6.045,-21.463 3.962,-23.546 3.962,-26.772 ; v1(23.089,-41.758) 23.089,-31.804 v1(23.419,-31.474) ; 23.089,-31.964 cw(c23.909,-31.964) v1@23.329,-31.384 ; 23.089,-31.941 cw(c23.854,-31.941) v1@23.332,-31.381
  MidLayer2 w1.016: v2(-22.225,-77.8) -22.225,-74.778 -20.574,-73.127 -2.388,-73.127 v2(1.016,-69.723) 1.265,-69.474 v2(1.265,-59.457) ; v2@1.106,-69.813 ccw(c0.721,-69.428) 1.265,-69.428
  Bottom Layer w0.762: v2(9.119,-41.885) 22.962,-41.885 v1(23.089,-41.758) ; v1(18.567,-20.244) 24.562,-20.244 26.187,-21.869 26.187,-28.705 v1(23.419,-31.474)
  Bottom Layer w1.016: v1@-27.788,-87.884 -27.788,-79.35 -26.238,-77.8 v2(-22.225,-77.8) ; v2(-19.227,-55.576) -0.659,-55.576 1.265,-57.501 v2(1.265,-59.457)
  other v1: -27.711,-89.535 -26.797,-89.535 -25.883,-89.535 -27.711,-88.659 -26.797,-88.659 -25.883,-88.659 -27.711,-87.782 -26.797,-87.782 -25.883,-87.782
ADC8: C12.2 R57.2 U7.89 | length 9.1
  Top Layer w0.28: U7.89@14.745,-37.524 14.745,-40.957 15.132,-41.345 C12.2@15.132,-43.793 R57.2@17.792,-43.793
ADC8_IN: P1.28 U4.27 | length 20.5
  Top Layer w0.381: v1(-7.95,-83.095) 6.69,-83.095 7.618,-84.023 U4.27@7.618,-84.988 ; U4.27@7.505,-84.876 ccw(c7.233,-84.603) 7.618,-84.603 ccw(c8.003,-84.603) U4.27@7.731,-84.876
  Bottom Layer w0.28: P1.28@-8.118,-83.8 ccw(c-8.51,-83.408) -7.955,-83.408 ccw(c-7.4,-83.408) P1.28@-7.792,-83.8 ; v1@-8.031,-83.176 cw(c-8.214,-83.359) -7.955,-83.359 ; P1.28@-7.955,-84.793 v1@-7.955,-83.1 ; -7.955,-83.382 cw(c-7.663,-83.382) v1@-7.87,-83.176
AGND: C2.2 C3.2 C4.2 C5.2 C6.2 C8.2 C9.2 C10.1 C11.2 C12.1 C35.1 C36.2 C39.1 D5.2 P1.2 P1.4 P10.6 U4.14 U4.16 U7.11 U7.32 U7.62 U7.81 U7.99 U14.9 U14.11 U14.13 U14.15 U18.15 U19.9 U19.11 U19.13 U19.15 | length 3
  Bottom Layer w0.28: P1.2@-24.465,-84.793 P1.4@-23.195,-84.793 ; P1.2@-24.302,-84.955 cw(c-23.91,-85.348) -23.91,-84.793 cw(c-23.91,-84.238) P1.2@-24.302,-84.63 ; P1.4@-23.358,-84.955 ccw(c-23.75,-85.348) -23.75,-84.793 ccw(c-23.75,-84.238) P1.4@-23.358,-84.63
  other v1: -56.337,-91.034 -55.169,-91.008 -59.233,-90.983 -60.325,-90.957 -61.925,-90.932 -57.963,-90.907 -48.946,-90.856 -53.797,-90.805 -51.613,-90.754 -55.778,-90.221 -50.013,-90.195 -32.004,-90.195 -58.395,-89.637 -61.9,-89.56 -53.162,-89.256 -48.92,-89.052 -50.267,-88.798 -33.299,-88.748 -56.667,-88.163 -61.976,-87.884 -34.722,-87.757 -36.551,-87.732 -32.08,-87.198 -58.064,-86.893 -60.147,-86.589 -61.925,-86.538 -56.718,-86.538 -54.204,-85.725 -61.925,-85.141 -58.293,-84.658 -45.923,-84.15 -62.078,-84.125 -35.154,-84.074 -41.351,-84.049 -38.811,-84.023 -60.3,-83.998 -25.735,-83.998 -55.956,-83.744 -61.9,-82.525 -51.511,-82.017 -53.873,-81.813 -61.9,-81.128 -60.757,-81.051 -56.566,-80.95 -61.849,-79.324 -61.671,-77.902 -61.9,-75.743 17.729,-75.336 20.549,-74.676 6.502,-74.651 11.227,-74.651 13.513,-74.6 4.699,-74.219 16.383,-74.143 -61.849,-73.812 20.777,-72.644 6.452,-72.492 8.128,-72.466 17.628,-72.085 10.82,-71.958 -61.697,-71.907 14.097,-71.857 12.725,-71.806 15.951,-71.78 -58.649,-70.968 -51.41,-70.968 -54.381,-70.917 -57.252,-70.739 -32.842,-70.688 20.65,-70.561 -55.829,-70.358 -61.824,-70.231 -29.591,-70.155 -25.222,-70.155 10.846,-70.129 -27.661,-70.104 -26.365,-70.104 12.7,-70.028 -50.851,-70.002 14.554,-70.002 9.677,-69.952 18.644,-69.571 -53.696,-69.393 -56.312,-69.317 -51.562,-69.266 -58.064,-69.113 -32.995,-69.037 -61.646,-68.783 20.396,-68.656 9.957,-68.605 -12.649,-68.478 8.56,-68.377 17.247,-68.351 -3.48,-68.275 -1.397,-68.25 14.834,-68.25 -9.195,-68.097 6.452,-68.072 -22.708,-67.589 -61.747,-67.335 -61.798,-66.142 6.655,-65.278 -9.982,-65.151 -26.035,-65.049 -47.879,-64.922 -57.607,-64.872 -54.864,-64.872 -23.216,-64.872 -52.349,-64.846 -35.611,-64.846 -61.722,-64.592 7.62,-64.211 -34.747,-64.008 -48.819,-63.449 -61.519,-63.424 6.883,-62.738 -61.57,-61.798 7.29,-60.325 -61.646,-60.122 6.883,-59.157 -61.646,-58.572 -25.806,-57.709 -60.274,-57.556 -29.999,-57.561 -23.165,-57.429 -47.803,-57.099 -57.76,-57.074 -61.697,-56.972 -54.432,-56.947 -50.47,-56.515 7.468,-56.439 -52.095,-56.007 -59.512,-55.778 -57.048,-55.575 -53.188,-55.55 -61.697,-55.321 -54.686,-54.889 -59.588,-54.534 -56.032,-54.381 -61.722,-53.772 -19.253,-53.67 -57.201,-53.619 -17.704,-53.365 -58.471,-52.984 15.088,-52.857 17.755,-52.807 19.812,-52.756 12.471,-52.73 22.53,-52.73 26.01,-52.73 28.296,-52.73 30.175,-52.68 -16.637,-52.476 -61.798,-52.222 -59.563,-52.222 30.277,-51.74 -60.706,-51.486 -15.342,-51.003 25.171,-50.8 21.285,-50.698 30.175,-49.886 -13.945,-49.809 27.508,-48.87 18.466,-48.717 15.799,-48.666 -12.319,-48.641 24.689,-48.565 30.455,-47.727 -11.024,-47.371 30.378,-46.33 27.102,-45.847 -9.627,-45.822 30.429,-44.755 -8.28,-44.399 30.378,-42.85 -7.087,-42.799 24.74,-42.291 27.508,-41.478 -5.944,-40.945 30.429,-40.818 21.514,-40.691 24.663,-40.665 -4.445,-40.259 24.486,-39.268 30.556,-39.192 21.539,-39.116 -4.877,-38.862 27.102,-38.481 -2.794,-38.252 30.505,-37.567 -3.607,-37.059 -2.083,-36.322 30.505,-36.322 27.305,-35.255 -2.692,-35.103 17.653,-34.823 30.505,-34.544 30.455,-33.299 25.908,-33.274 24.206,-33.198 -1.626,-33.096 -2.261,-32.182 12.116,-32.131 30.455,-31.953 4.597,-31.623 19.406,-31.623 17.094,-31.471 16.129,-30.963 30.556,-30.709 12.09,-30.328 30.556,-28.981 18.517,-28.931 -0.94,-28.118 29.997,-28.118 23.47,-27.711 4.623,-27.661 27.838,-27.635 24.994,-27.584 30.505,-26.721 -0.483,-26.34 18.39,-26.238 29.566,-25.832 12.802,-25.629 30.455,-25.527 8.56,-25.425 -0.254,-24.765 29.566,-24.028 30.353,-23.749 28.448,-23.241 -0.203,-22.962 30.048,-22.352 21.311,-21.692 22.454,-21.692 -0.127,-21.057 4.928,-21.031 28.067,-20.98 30.048,-20.803 14.478,-20.523 17.399,-20.091 13.208,-19.914 18.161,-19.38 27.864,-19.38 -0.076,-19.101 12.852,-18.567 30.302,-18.491 18.237,-17.958 8.814,-17.932 29.642,-17.932 5.893,-17.856 10.185,-17.729 11.481,-17.374 -0.127,-17.247 19.202,-16.967 22.068,-16.967 20.193,-16.815 9.017,-16.713 10.363,-16.713 4.877,-16.612 28.296,-16.358 2.083,-16.154 30.429,-15.799 29.312,-15.621 -0.051,-15.24 30.226,-14.021 4.978,-13.945 28.067,-13.284 30.302,-12.979 1.448,-12.929 -0.127,-12.903 12.243,-12.395 14.453,-12.217 16.815,-12.192 18.11,-12.192 29.769,-12.167 5.334,-12.116 28.372,-11.786 12.522,-11.227 16.078,-10.744 30.429,-10.744 5.918,-10.668 18.085,-10.592 -0.254,-10.541 14.427,-10.465 29.464,-10.389 2.946,-10.16 30.455,-9.677 11.125,-9.627 19.101,-9.119 1.016,-9.093 29.108,-9.093 17.501,-9.017 13.538,-8.788 16.027,-8.636 -0.203,-8.611 9.347,-8.585 30.201,-8.407 28.804,-7.595 4.674,-7.239 30.048,-7.239 18.517,-7.188 17.094,-6.883 2.718,-6.833 -0.356,-6.807 30.124,-6.045 1.321,-5.232 -0.279,-4.928 30.201,-4.42 17.247,-4.267 18.745,-3.937 3.429,-3.429 -0.178,-2.769 29.997,-2.311 1.727,-2.261 16.815,-1.626 19.101,-1.473 0.102,-1.168 8.814,-0.965 30.277,-0.965 5.69,-0.94 29.032,-0.94 4.724,-0.914 20.396,-0.914 3.454,-0.889 7.239,-0.864 27.457,-0.838 1.803,-0.813 24.105,-0.787 21.996,-0.762 25.654,-0.762 17.475,-0.61
  other v2: -60.985,-88.646 -23.597,-86.817 -25.171,-86.792 -26.67,-86.766
GND: C1.1 C7.2 P1.24 U4.2 U4.28 U6.9 U6.11 U6.13 U6.15 U15.9 U15.11 U15.13 U15.15 U18.9 U18.11 U18.13 | length 5.7
  Bottom Layer w0.6: P1.24@-10.495,-84.793 -10.495,-82.326 -10.008,-81.839 v2(-7.468,-81.839)
  other v1: 8.255,-91.415 -13.995,-91.262 -7.518,-91.211 -20.371,-91.186 -18.974,-91.186 -17.221,-91.186 -15.57,-91.186 10.617,-91.186 -12.268,-91.161 0.686,-91.161 6.02,-91.161 -5.131,-91.135 -9.119,-91.11 -0.787,-91.084 12.294,-91.084 -10.211,-91.059 -2.845,-91.059 3.15,-91.034 19.38,-90.983 20.777,-90.678 14.605,-90.602 17.145,-90.119 -3.886,-89.992 8.865,-89.941 19.38,-89.84 -2.083,-89.814 4.42,-89.738 -0.406,-89.713 20.777,-89.459 6.604,-89.433 8.306,-88.9 -4.115,-88.773 2.438,-88.646 0.279,-87.909 20.65,-87.706 19.406,-87.63 -4.089,-87.122 1.702,-86.716 5.613,-86.385 10.846,-86.157 19.812,-86.157 12.979,-85.903 0.483,-85.75 20.65,-85.395 9.855,-84.633 14.3,-84.531 4.775,-84.506 12.37,-84.176 20.853,-84.049 18.517,-84.023 10.236,-83.693 13.945,-83.134 16.942,-82.804 12.09,-82.728 20.853,-82.169 18.313,-82.093 10.82,-81.636 7.569,-81.585 13.868,-81.382 16.358,-81.331 19.406,-81.305 -43.815,-80.874 -37.567,-80.848 -40.564,-80.747 -46.304,-80.569 20.98,-80.467 4.623,-80.137 6.985,-80.137 -34.874,-80.035 17.602,-79.985 11.379,-79.934 13.437,-79.578 19.482,-79.502 21.107,-79.197 16.281,-79.07 -20.955,-76.81 -8.814,-74.193 -36.246,-73.025 -22.022,-72.288 -9.652,-71.73 0.787,-71.552 -7.239,-71.526 -45.212,-71.476 -40.64,-71.476 -42.189,-71.399 -39.421,-71.399 -37.186,-71.399 -17.094,-71.374 -15.519,-71.349 -2.921,-71.323 -18.923,-71.298 -20.625,-71.272 -44.044,-71.171
IN1: P1.17 R69.2 U18.14 | length 26.2
  Top Layer w0.28: R69.2@-14.385,-76.14 ccw(c-14.914,-75.611) -14.166,-75.611 ; U18.14@-14.296,-73.885 cw(c-14.612,-74.201) -14.166,-74.201 cw(c-13.719,-74.201) U18.14@-14.035,-73.885 ; v1@-14.246,-75.011 cw(c-14.441,-75.205) -14.166,-75.205 cw(c-13.89,-75.205) v1@-14.085,-75.011 ; v1@-14.246,-74.849 ccw(c-14.441,-74.655) -14.166,-74.655 ccw(c-13.89,-74.655) v1@-14.085,-74.849 ; -14.166,-75.611 ccw(c-13.138,-75.611) R69.2@-13.865,-76.338 ; v1@-14.166,-74.935 ccw(c-12.462,-74.935) R69.2@-13.667,-76.14 ; U18.14@-14.166,-73.254 v1(-14.166,-74.93) -14.166,-76.359 R69.2@-14.026,-76.499
  MidLayer2 w0.28: v1(-14.3,-86.995) -11.765,-84.46 -11.765,-76.271 -13.106,-74.93 v1(-14.166,-74.93) ; v1@-14.3,-86.881 ccw(c-14.3,-86.606) -14.106,-86.8 ccw(c-13.911,-86.995) v1@-14.186,-86.995 ; v1@-14.085,-75.011 cw(c-13.89,-75.205) -13.89,-74.93 cw(c-13.89,-74.655) v1@-14.085,-74.849
  Bottom Layer w0.28: P1.17@-14.468,-87.7 ccw(c-14.86,-87.308) -14.305,-87.308 ccw(c-13.75,-87.308) P1.17@-14.142,-87.7 ; v1@-14.381,-87.076 cw(c-14.564,-87.259) -14.305,-87.259 ; P1.17@-14.305,-88.693 v1@-14.305,-87 ; -14.305,-87.282 cw(c-14.013,-87.282) v1@-14.22,-87.076
IN2: P1.13 R73.2 U18.10 | length 25
  Top Layer w0.28: U18.10@-19.376,-73.885 cw(c-19.692,-74.201) -19.246,-74.201 cw(c-18.799,-74.201) U18.10@-19.115,-73.885 ; v1@-19.326,-75.036 cw(c-19.521,-75.231) -19.246,-75.231 cw(c-18.97,-75.231) v1@-19.165,-75.036 ; v1@-19.326,-74.875 ccw(c-19.521,-74.68) -19.246,-74.68 ccw(c-18.97,-74.68) v1@-19.165,-74.875 ; R73.2@-19.258,-76.499 -19.246,-76.486 v1(-19.246,-74.955) U18.10@-19.246,-73.254
  MidLayer2 w0.28: v1(-19.246,-74.955) -18.415,-74.955 -13.513,-79.858 -13.513,-81.432 -13.513,-83.668 v1(-16.84,-86.995) ; v1@-19.165,-75.036 cw(c-18.97,-75.231) -18.97,-74.955 cw(c-18.97,-74.68) v1@-19.165,-74.875 ; v1@-16.84,-86.881 ccw(c-16.84,-86.606) -16.646,-86.8 ccw(c-16.451,-86.995) v1@-16.726,-86.995
  Bottom Layer w0.28: P1.13@-17.008,-87.7 ccw(c-17.4,-87.308) -16.845,-87.308 ccw(c-16.29,-87.308) P1.13@-16.682,-87.7 ; v1@-16.921,-87.076 cw(c-17.104,-87.259) -16.845,-87.259 ; P1.13@-16.845,-88.693 v1@-16.845,-87 ; -16.845,-87.282 cw(c-16.553,-87.282) v1@-16.76,-87.076
INH: P1.15 R71.2 U18.12 | length 24.3
  Top Layer w0.28: U18.12@-16.836,-73.885 cw(c-17.152,-74.201) -16.706,-74.201 cw(c-16.259,-74.201) U18.12@-16.575,-73.885 ; v1@-16.786,-75.036 cw(c-16.981,-75.231) -16.706,-75.231 cw(c-16.43,-75.231) v1@-16.625,-75.036 ; v1@-16.786,-74.875 ccw(c-16.981,-74.68) -16.706,-74.68 ccw(c-16.43,-74.68) v1@-16.625,-74.875 ; U18.12@-16.706,-73.254 v1(-16.706,-74.955) -16.706,-76.334 R71.2@-16.54,-76.499
  MidLayer2 w0.28: v1(-16.706,-74.955) -15.646,-74.955 -12.675,-77.927 -12.675,-84.099 v1(-15.57,-86.995) ; v1@-16.625,-75.036 cw(c-16.43,-75.231) -16.43,-74.955 cw(c-16.43,-74.68) v1@-16.625,-74.875 ; v1@-15.57,-86.881 ccw(c-15.57,-86.606) -15.376,-86.8 ccw(c-15.181,-86.995) v1@-15.456,-86.995
  Bottom Layer w0.28: P1.15@-15.738,-87.7 ccw(c-16.13,-87.308) -15.575,-87.308 ccw(c-15.02,-87.308) P1.15@-15.412,-87.7 ; v1@-15.651,-87.076 cw(c-15.834,-87.259) -15.575,-87.259 ; P1.15@-15.575,-88.693 v1@-15.575,-87 ; -15.575,-87.282 cw(c-15.283,-87.282) v1@-15.49,-87.076
NetC5_1: C5.1 U7.98 | length 6.8
  Top Layer w0.305: U7.98@19.245,-37.524 19.245,-40.022 20.429,-41.206 C5.1@20.429,-43.793
NetC6_1: C6.1 R45.1 U7.33 Y1.1 | length 10
  Top Layer w0.28: Y1.1@16.503,-15.113 18.81,-15.113 ; U7.33@16.745,-22.424 16.745,-18.47 R45.1@16.762,-18.452 Y1.1@16.762,-15.373 ; 18.821,-15.124 18.81,-15.113 ; C6.1@19.01,-15.276 ccw(c18.81,-15.318) 18.81,-15.113 ; C6.1@19.045,-14.962 cw(c18.81,-14.855) 18.81,-15.113
NetC8_1: C8.1 R45.2 U7.34 Y1.2 | length 14
  Top Layer w0.28: C8.1@9.322,-14.968 11.403,-14.968 ; 11.405,-14.97 11.403,-14.968 ; Y1.2@11.596,-14.792 cw(c11.403,-14.775) 11.403,-14.968 ; Y1.2@11.64,-15.135 ccw(c11.403,-15.22) 11.403,-14.968 ; Y1.2@12.403,-15.113 13.462,-15.113 ; Y1.2@13.184,-15.325 cw(c13.462,-15.401) 13.462,-15.113 ; Y1.2@13.184,-14.901 ccw(c13.462,-14.825) 13.462,-15.113 ; R45.2@14.317,-18.896 cw(c14.087,-19.312) 14.562,-19.312 ; R45.2@14.808,-18.896 ccw(c15.037,-19.312) 14.562,-19.312 ; U7.34@16.245,-22.424 16.245,-20.994 14.562,-19.312 ; 13.462,-15.113 14.562,-16.213 R45.2@14.562,-18.452 14.562,-19.312
NetD2_1: D2.1 R8.1 | length 11.7
  Top Layer w0.28: D2.1@6.04,-2.839 7.29,-2.839 7.717,-3.266 7.717,-6.172 6.731,-7.158 R8.1@6.731,-12.718
NetR2_1: R2.1 U6.1 | length 4.1
  Top Layer w0.28: U6.1@1.134,-66.123 ccw(c0.819,-65.808) 1.265,-65.808 ccw(c1.712,-65.808) U6.1@1.396,-66.123 ; U6.1@1.265,-66.754 R2.1@1.265,-63.306
NetR6_1: R6.1 U15.1 | length 4.2
  Top Layer w0.28: U15.1@-37.538,-66.123 ccw(c-37.854,-65.808) -37.407,-65.808 ccw(c-36.96,-65.808) U15.1@-37.276,-66.123 ; R6.1@-37.413,-63.286 -37.407,-63.292 U15.1@-37.407,-66.754
NetR10_1: R10.1 U6.3 | length 4.2
  Top Layer w0.28: U6.3@-1.406,-66.123 ccw(c-1.721,-65.808) -1.275,-65.808 ccw(c-0.828,-65.808) U6.3@-1.144,-66.123 ; U6.3@-1.275,-66.754 -1.275,-63.338 R10.1@-1.247,-63.311
NetR22_1: R22.1 U15.3 | length 4.2
  Top Layer w0.28: U15.3@-40.078,-66.123 ccw(c-40.394,-65.808) -39.947,-65.808 ccw(c-39.5,-65.808) U15.3@-39.816,-66.123 ; R22.1@-39.962,-63.286 -39.947,-63.3 U15.3@-39.947,-66.754
NetR40_1: R40.1 U14.1 | length 4.2
  Top Layer w0.28: U14.1@-24.647,-66.123 ccw(c-25.025,-65.745) -24.49,-65.745 ; U14.1@-24.516,-66.754 -24.49,-66.728 R40.1@-24.49,-63.306 ; -24.49,-65.87 ccw(c-24.132,-65.87) U14.1@-24.385,-66.123
NetR41_1: R41.1 U14.3 | length 4.2
  Top Layer w0.28: U14.3@-27.187,-66.123 ccw(c-27.503,-65.808) -27.056,-65.808 ccw(c-26.61,-65.808) U14.3@-26.925,-66.123 ; U14.3@-27.056,-66.754 -27.056,-63.37 R41.1@-26.998,-63.311
NetR44_1: R44.1 U14.5 | length 6.8
  Top Layer w0.28: R44.1@-29.864,-63.67 cw(c-30.511,-64.317) -29.596,-64.317 ; U14.5@-29.727,-66.123 ccw(c-30.043,-65.808) -29.596,-65.808 ccw(c-29.15,-65.808) U14.5@-29.465,-66.123 ; U14.5@-29.596,-66.754 -29.596,-63.402 R44.1@-29.505,-63.311 ; -29.596,-64.757 cw(c-28.059,-64.757) R44.1@-29.146,-63.67 ; -29.596,-64.081 cw(c-28.735,-64.081) R44.1@-29.344,-63.472
NetR46_1: R46.1 U19.1 | length 3.9
  Top Layer w0.254: U19.1@-58.997,-73.894 cw(c-59.335,-74.232) -58.857,-74.232 cw(c-58.379,-74.232) U19.1@-58.717,-73.894 ; U19.1@-58.857,-73.254 -58.857,-76.41 R46.1@-58.844,-76.423
NetR47_1: R47.1 U19.3 | length 6.7
  Top Layer w0.254: R47.1@-56.596,-76.054 ccw(c-57.27,-75.38) -56.317,-75.38 ; U19.3@-56.457,-73.894 cw(c-56.795,-74.232) -56.317,-74.232 cw(c-55.839,-74.232) U19.3@-56.177,-73.894 ; -56.317,-75.564 ccw(c-55.369,-75.564) R47.1@-56.039,-76.234 ; -56.317,-74.951 ccw(c-54.756,-74.951) R47.1@-55.86,-76.054 ; U19.3@-56.317,-73.254 -56.317,-76.334 R47.1@-56.228,-76.423
NetR48_1: R48.1 U19.5 | length 6.7
  Top Layer w0.254: R48.1@-54.043,-76.054 ccw(c-54.687,-75.411) -53.777,-75.411 ; U19.5@-53.917,-73.894 cw(c-54.255,-74.232) -53.777,-74.232 cw(c-53.299,-74.232) U19.5@-53.637,-73.894 ; -53.777,-75.533 ccw(c-52.786,-75.533) R48.1@-53.486,-76.234 ; -53.777,-74.92 ccw(c-52.173,-74.92) R48.1@-53.307,-76.054 ; U19.5@-53.777,-73.254 -53.777,-76.321 R48.1@-53.675,-76.423
NetR52_1: R52.1 U19.7 | length 6.6
  Top Layer w0.254: R52.1@-51.529,-76.054 ccw(c-52.234,-75.35) -51.237,-75.35 ; U19.7@-51.377,-73.894 cw(c-51.715,-74.232) -51.237,-74.232 cw(c-50.759,-74.232) U19.7@-51.097,-73.894 ; -51.237,-75.595 ccw(c-50.333,-75.595) R52.1@-50.972,-76.234 ; -51.237,-74.982 ccw(c-49.719,-74.982) R52.1@-50.792,-76.054 ; U19.7@-51.237,-73.254 -51.237,-76.346 R52.1@-51.16,-76.423
NetR54_1: R54.1 U14.7 | length 4.2
  Top Layer w0.28: U14.7@-32.267,-66.123 ccw(c-32.583,-65.808) -32.136,-65.808 ccw(c-31.69,-65.808) U14.7@-32.005,-66.123 ; U14.7@-32.136,-66.754 -32.136,-63.435 R54.1@-32.012,-63.311
NetR57_1: R57.1 U4.13 | length 45.6
  Top Layer w0.28: v1(14.986,-71.018) U4.13@16.918,-71.018 ; v1@15.067,-71.099 cw(c15.261,-71.294) 15.261,-71.018 cw(c15.261,-70.743) v1@15.067,-70.938 ; U4.13@16.045,-71.167 ccw(c15.686,-71.525) 15.686,-71.018 ccw(c15.686,-70.511) U4.13@16.045,-70.87 ; v1@17.712,-47.303 ccw(c17.517,-47.108) 17.792,-47.108 ccw(c18.068,-47.108) v1@17.873,-47.303 ; v1(17.792,-47.383) R57.1@17.792,-45.993
  MidLayer2 w0.28: v1@14.905,-71.099 ccw(c14.711,-71.294) 14.711,-71.018 ccw(c14.711,-70.743) v1@14.905,-70.938 ; v1(14.986,-71.018) 6.934,-71.018 5.029,-69.113 5.029,-56.794 14.44,-47.383 v1(17.792,-47.383) ; v1@17.712,-47.464 ccw(c17.517,-47.659) 17.517,-47.383 ccw(c17.517,-47.108) v1@17.712,-47.303
NetR58_1: R58.1 U6.5 | length 4.2
  Top Layer w0.28: U6.5@-3.946,-66.123 ccw(c-4.261,-65.808) -3.815,-65.808 ccw(c-3.368,-65.808) U6.5@-3.684,-66.123 ; U6.5@-3.815,-66.754 -3.815,-63.366 R58.1@-3.76,-63.311
NetR60_1: R60.1 U15.5 | length 4.2
  Top Layer w0.28: U15.5@-42.618,-66.123 ccw(c-42.934,-65.808) -42.487,-65.808 ccw(c-42.04,-65.808) U15.5@-42.356,-66.123 ; R60.1@-42.51,-63.286 -42.487,-63.309 U15.5@-42.487,-66.754
NetR62_1: R62.1 U6.7 | length 4.2
  Top Layer w0.28: U6.7@-6.486,-66.123 ccw(c-6.801,-65.808) -6.355,-65.808 ccw(c-5.908,-65.808) U6.7@-6.224,-66.123 ; U6.7@-6.355,-66.754 -6.355,-63.393 R62.1@-6.273,-63.311
NetR64_1: R64.1 U15.7 | length 4.2
  Top Layer w0.28: U15.7@-45.158,-66.123 ccw(c-45.474,-65.808) -45.027,-65.808 ccw(c-44.58,-65.808) U15.7@-44.896,-66.123 ; R64.1@-45.059,-63.286 -45.027,-63.317 U15.7@-45.027,-66.754
NetR66_1: R66.1 U18.1 | length 4.2
  Top Layer w0.28: U18.1@-11.756,-66.123 ccw(c-12.117,-65.762) -11.607,-65.762 ; U18.1@-11.626,-66.754 -11.607,-66.736 R66.1@-11.607,-63.311 ; -11.607,-65.853 ccw(c-11.224,-65.853) U18.1@-11.495,-66.123
NetR68_1: R68.1 U18.3 | length 6.1
  Top Layer w0.28: R68.1@-14.506,-63.67 cw(c-15.327,-64.492) -14.166,-64.492 ; U18.3@-14.296,-66.123 ccw(c-14.612,-65.808) -14.166,-65.808 ccw(c-13.719,-65.808) U18.3@-14.035,-66.123 ; U18.3@-14.166,-66.754 -14.166,-63.33 R68.1@-14.147,-63.311 ; -14.166,-64.582 cw(c-12.876,-64.582) R68.1@-13.788,-63.67
NetR70_1: R70.1 U18.5 | length 6.1
  Top Layer w0.28: R70.1@-17.046,-63.67 cw(c-17.867,-64.492) -16.706,-64.492 ; U18.5@-16.836,-66.123 ccw(c-17.152,-65.808) -16.706,-65.808 ccw(c-16.259,-65.808) U18.5@-16.575,-66.123 ; U18.5@-16.706,-66.754 -16.706,-63.33 R70.1@-16.687,-63.311 ; -16.706,-64.582 cw(c-15.416,-64.582) R70.1@-16.328,-63.67
NetR72_1: R72.1 U18.7 | length 6.1
  Top Layer w0.28: R72.1@-19.586,-63.67 cw(c-20.407,-64.492) -19.246,-64.492 ; U18.7@-19.376,-66.123 ccw(c-19.692,-65.808) -19.246,-65.808 ccw(c-18.799,-65.808) U18.7@-19.115,-66.123 ; U18.7@-19.246,-66.754 -19.246,-63.33 R72.1@-19.227,-63.311 ; -19.246,-64.582 cw(c-17.956,-64.582) R72.1@-18.868,-63.67
P1_A: P1.9 U19.6 | length 50.1
  Top Layer w0.28: U19.6@-52.637,-73.885 cw(c-52.953,-74.201) -52.507,-74.201 cw(c-52.06,-74.201) U19.6@-52.376,-73.885 ; v1@-52.587,-74.87 ccw(c-52.782,-74.675) -52.507,-74.675 ccw(c-52.231,-74.675) v1@-52.426,-74.87 ; v1(-52.507,-74.951) U19.6@-52.507,-73.254
  MidLayer2 w0.28: v1@-52.587,-75.031 cw(c-52.782,-75.226) -52.507,-75.226 cw(c-52.231,-75.226) v1@-52.426,-75.031 ; v1(-52.507,-74.951) -52.507,-84.069 -51.181,-85.395 -20.98,-85.395 v1(-19.38,-86.995) ; v1@-19.494,-86.995 ccw(c-19.769,-86.995) -19.575,-86.8 ccw(c-19.38,-86.606) v1@-19.38,-86.881
  Bottom Layer w0.28: P1.9@-19.548,-87.7 ccw(c-19.94,-87.308) -19.385,-87.308 ccw(c-18.83,-87.308) P1.9@-19.222,-87.7 ; v1@-19.461,-87.076 cw(c-19.644,-87.259) -19.385,-87.259 ; P1.9@-19.385,-88.693 v1@-19.385,-87 ; -19.385,-87.282 cw(c-19.093,-87.282) v1@-19.3,-87.076
P7_A: P1.11 U19.8 | length 48.7
  Top Layer w0.28: U19.8@-50.097,-73.885 cw(c-50.413,-74.201) -49.967,-74.201 cw(c-49.52,-74.201) U19.8@-49.836,-73.885 ; v1@-50.047,-74.87 ccw(c-50.242,-74.675) -49.967,-74.675 ccw(c-49.691,-74.675) v1@-49.886,-74.87 ; v1(-49.967,-74.951) U19.8@-49.967,-73.254
  MidLayer2 w0.28: v1@-50.047,-75.031 cw(c-50.242,-75.226) -49.967,-75.226 cw(c-49.691,-75.226) v1@-49.886,-75.031 ; v1(-49.967,-74.951) -49.967,-83.739 -48.92,-84.785 -20.32,-84.785 v1(-18.11,-86.995) ; v1@-18.224,-86.995 ccw(c-18.499,-86.995) -18.305,-86.8 ccw(c-18.11,-86.606) v1@-18.11,-86.881
  Bottom Layer w0.28: P1.11@-18.278,-87.7 ccw(c-18.67,-87.308) -18.115,-87.308 ccw(c-17.56,-87.308) P1.11@-17.952,-87.7 ; v1@-18.191,-87.076 cw(c-18.374,-87.259) -18.115,-87.259 ; P1.11@-18.115,-88.693 v1@-18.115,-87 ; -18.115,-87.282 cw(c-17.823,-87.282) v1@-18.03,-87.076
P13_A: P1.5 U19.2 | length 56.9
  Top Layer w0.28: U19.2@-57.717,-73.885 cw(c-58.033,-74.201) -57.587,-74.201 cw(c-57.14,-74.201) U19.2@-57.456,-73.885 ; v1@-57.667,-74.87 ccw(c-57.862,-74.675) -57.587,-74.675 ccw(c-57.311,-74.675) v1@-57.506,-74.87 ; v1(-57.587,-74.951) U19.2@-57.587,-73.254
  MidLayer2 w0.28: v1@-57.667,-75.031 cw(c-57.862,-75.226) -57.587,-75.226 cw(c-57.311,-75.226) v1@-57.506,-75.031 ; v1(-57.587,-74.951) -57.587,-83.841 -54.432,-86.995 -33.807,-86.995 -30.124,-90.678 -23.47,-90.678 -21.92,-89.129 v1(-21.92,-86.995) ; v1@-22.001,-87.076 cw(c-22.195,-87.27) -21.92,-87.27 cw(c-21.645,-87.27) v1@-21.84,-87.076
  Bottom Layer w0.28: P1.5@-22.088,-87.7 ccw(c-22.48,-87.308) -21.925,-87.308 ccw(c-21.37,-87.308) P1.5@-21.762,-87.7 ; v1@-22.001,-87.076 cw(c-22.184,-87.259) -21.925,-87.259 ; P1.5@-21.925,-88.693 v1@-21.925,-87 ; -21.925,-87.282 cw(c-21.633,-87.282) v1@-21.84,-87.076
PA2: U7.76 U15.6 | length 70.9
  Top Layer w0.28: U15.6@-43.888,-66.123 ccw(c-44.204,-65.808) -43.757,-65.808 ccw(c-43.31,-65.808) U15.6@-43.626,-66.123 ; v1@-43.838,-65.391 cw(c-44.032,-65.586) -43.757,-65.586 cw(c-43.482,-65.586) v1@-43.676,-65.391 ; v1@-43.764,-65.303 v1(-43.757,-65.311) U15.6@-43.757,-66.754 ; v1@4.369,-37.516 v1(4.377,-37.524) U7.76@8.245,-37.524 ; v1@4.457,-37.604 cw(c4.652,-37.799) 4.652,-37.524 cw(c4.652,-37.249) v1@4.457,-37.443
  MidLayer2 w0.28: v1@-43.838,-65.23 ccw(c-44.032,-65.035) -43.757,-65.035 ccw(c-43.482,-65.035) v1@-43.676,-65.23 ; v1(-43.757,-65.311) -43.757,-62.502 -42.951,-61.697 -16.688,-61.697 4.369,-40.64 v1@4.369,-37.516 ; v1@4.296,-37.604 cw(c4.121,-37.78) 4.369,-37.78 ; 4.369,-37.819 cw(c4.672,-37.819) v1@4.457,-37.604
PA2_A: P1.8 R61.2 U15.12 | length 37.4
  Top Layer w0.254: U15.12@-42.627,-73.894 cw(c-42.965,-74.232) -42.487,-74.232 cw(c-42.009,-74.232) U15.12@-42.347,-73.894 ; v1@-42.577,-74.842 cw(c-42.794,-75.059) -42.487,-75.059 cw(c-42.18,-75.059) v1@-42.397,-74.842 ; v1@-42.577,-74.662 ccw(c-42.794,-74.446) -42.487,-74.446 ccw(c-42.18,-74.446) v1@-42.397,-74.662 ; R61.2@-42.491,-76.55 -42.487,-76.546 v1(-42.487,-74.752) U15.12@-42.487,-73.254
  MidLayer2 w0.254: v1@-42.577,-74.842 cw(c-42.794,-75.059) -42.487,-75.059 cw(c-42.18,-75.059) v1@-42.397,-74.842 ; v1(-42.487,-74.752) -42.487,-80.068 -40.259,-82.296 -21.437,-82.296 v1(-20.645,-83.087) ; v1@-20.772,-83.087 ccw(c-21.079,-83.087) -20.862,-82.871 ccw(c-20.645,-82.654) v1@-20.645,-82.96
  Bottom Layer w0.28: P1.8@-20.818,-83.8 ccw(c-21.222,-83.396) -20.65,-83.396 ; v1@-20.726,-83.168 cw(c-20.909,-83.351) -20.65,-83.351 ; P1.8@-20.65,-84.785 v1@-20.65,-83.092 ; -20.65,-83.419 ccw(c-20.111,-83.419) P1.8@-20.492,-83.8 ; -20.65,-83.374 cw(c-20.359,-83.374) v1@-20.565,-83.168
PA3_A: P1.7 U19.4 | length 51
  Top Layer w0.28: U19.4@-55.177,-73.885 cw(c-55.493,-74.201) -55.047,-74.201 cw(c-54.6,-74.201) U19.4@-54.916,-73.885 ; v1@-55.127,-74.87 ccw(c-55.322,-74.675) -55.047,-74.675 ccw(c-54.771,-74.675) v1@-54.966,-74.87 ; v1(-55.047,-74.951) U19.4@-55.047,-73.254
  MidLayer2 w0.28: v1@-55.127,-75.031 cw(c-55.322,-75.226) -55.047,-75.226 cw(c-54.771,-75.226) v1@-54.966,-75.031 ; v1(-55.047,-74.951) -55.047,-83.282 -52.273,-86.055 -21.59,-86.055 v1(-20.65,-86.995) ; v1@-20.764,-86.995 ccw(c-21.039,-86.995) -20.845,-86.8 ccw(c-20.65,-86.606) v1@-20.65,-86.881
  Bottom Layer w0.28: P1.7@-20.818,-87.7 ccw(c-21.21,-87.308) -20.655,-87.308 ccw(c-20.1,-87.308) P1.7@-20.492,-87.7 ; v1@-20.731,-87.076 cw(c-20.914,-87.259) -20.655,-87.259 ; P1.7@-20.655,-88.693 v1@-20.655,-87 ; -20.655,-87.282 cw(c-20.363,-87.282) v1@-20.57,-87.076
PA6: U7.72 U14.6 | length 63.5
  Top Layer w0.28: U14.6@-30.997,-66.123 ccw(c-31.313,-65.808) -30.866,-65.808 ccw(c-30.42,-65.808) U14.6@-30.735,-66.123 ; v1@-30.947,-65.391 cw(c-31.141,-65.586) -30.866,-65.586 cw(c-30.591,-65.586) v1@-30.786,-65.391 ; v1@-30.874,-65.303 v1(-30.866,-65.311) U14.6@-30.866,-66.754 ; U7.72@6.695,-34.474 8.757,-34.474 8.763,-34.468 v1(8.382,-34.468) ; 8.092,-34.474 ccw(c8.092,-34.178) v1@8.301,-34.387 ; 8.121,-34.474 cw(c8.121,-34.728) v1@8.301,-34.548 ; 8.643,-34.474 ccw(c8.643,-34.728) 8.463,-34.548 cw(c8.657,-34.743) 8.657,-34.468 cw(c8.657,-34.193) 8.463,-34.387 ccw(c8.672,-34.178) 8.672,-34.474
  MidLayer2 w0.28: v1@-30.947,-65.23 ccw(c-31.141,-65.035) -30.866,-65.035 ccw(c-30.591,-65.035) v1@-30.786,-65.23 ; v1(-30.866,-65.311) -30.866,-64.42 -30.353,-63.906 -14.63,-63.906 7.267,-42.009 7.267,-38.148 8.382,-37.033 v1(8.382,-34.468) ; v1@8.301,-34.548 cw(c8.107,-34.743) 8.382,-34.743 cw(c8.657,-34.743) v1@8.463,-34.548